# Altium PCB BEE_BOARD_PANNEL.PcbDoc
Units mm, origin at the board's own origin, x right, y up, seen from the top; angles counter-clockwise.
Board outline 177.8 x 172.72 mm, 8 copper layers (Top, GND1, PWR1, GND2, SIG1, GND3, SIG2, Bottom), stack 1.642 mm thick; 16 components, 55 nets, 6 pads, 0 vias.
Unrouted connection lines stored in the file: 24.
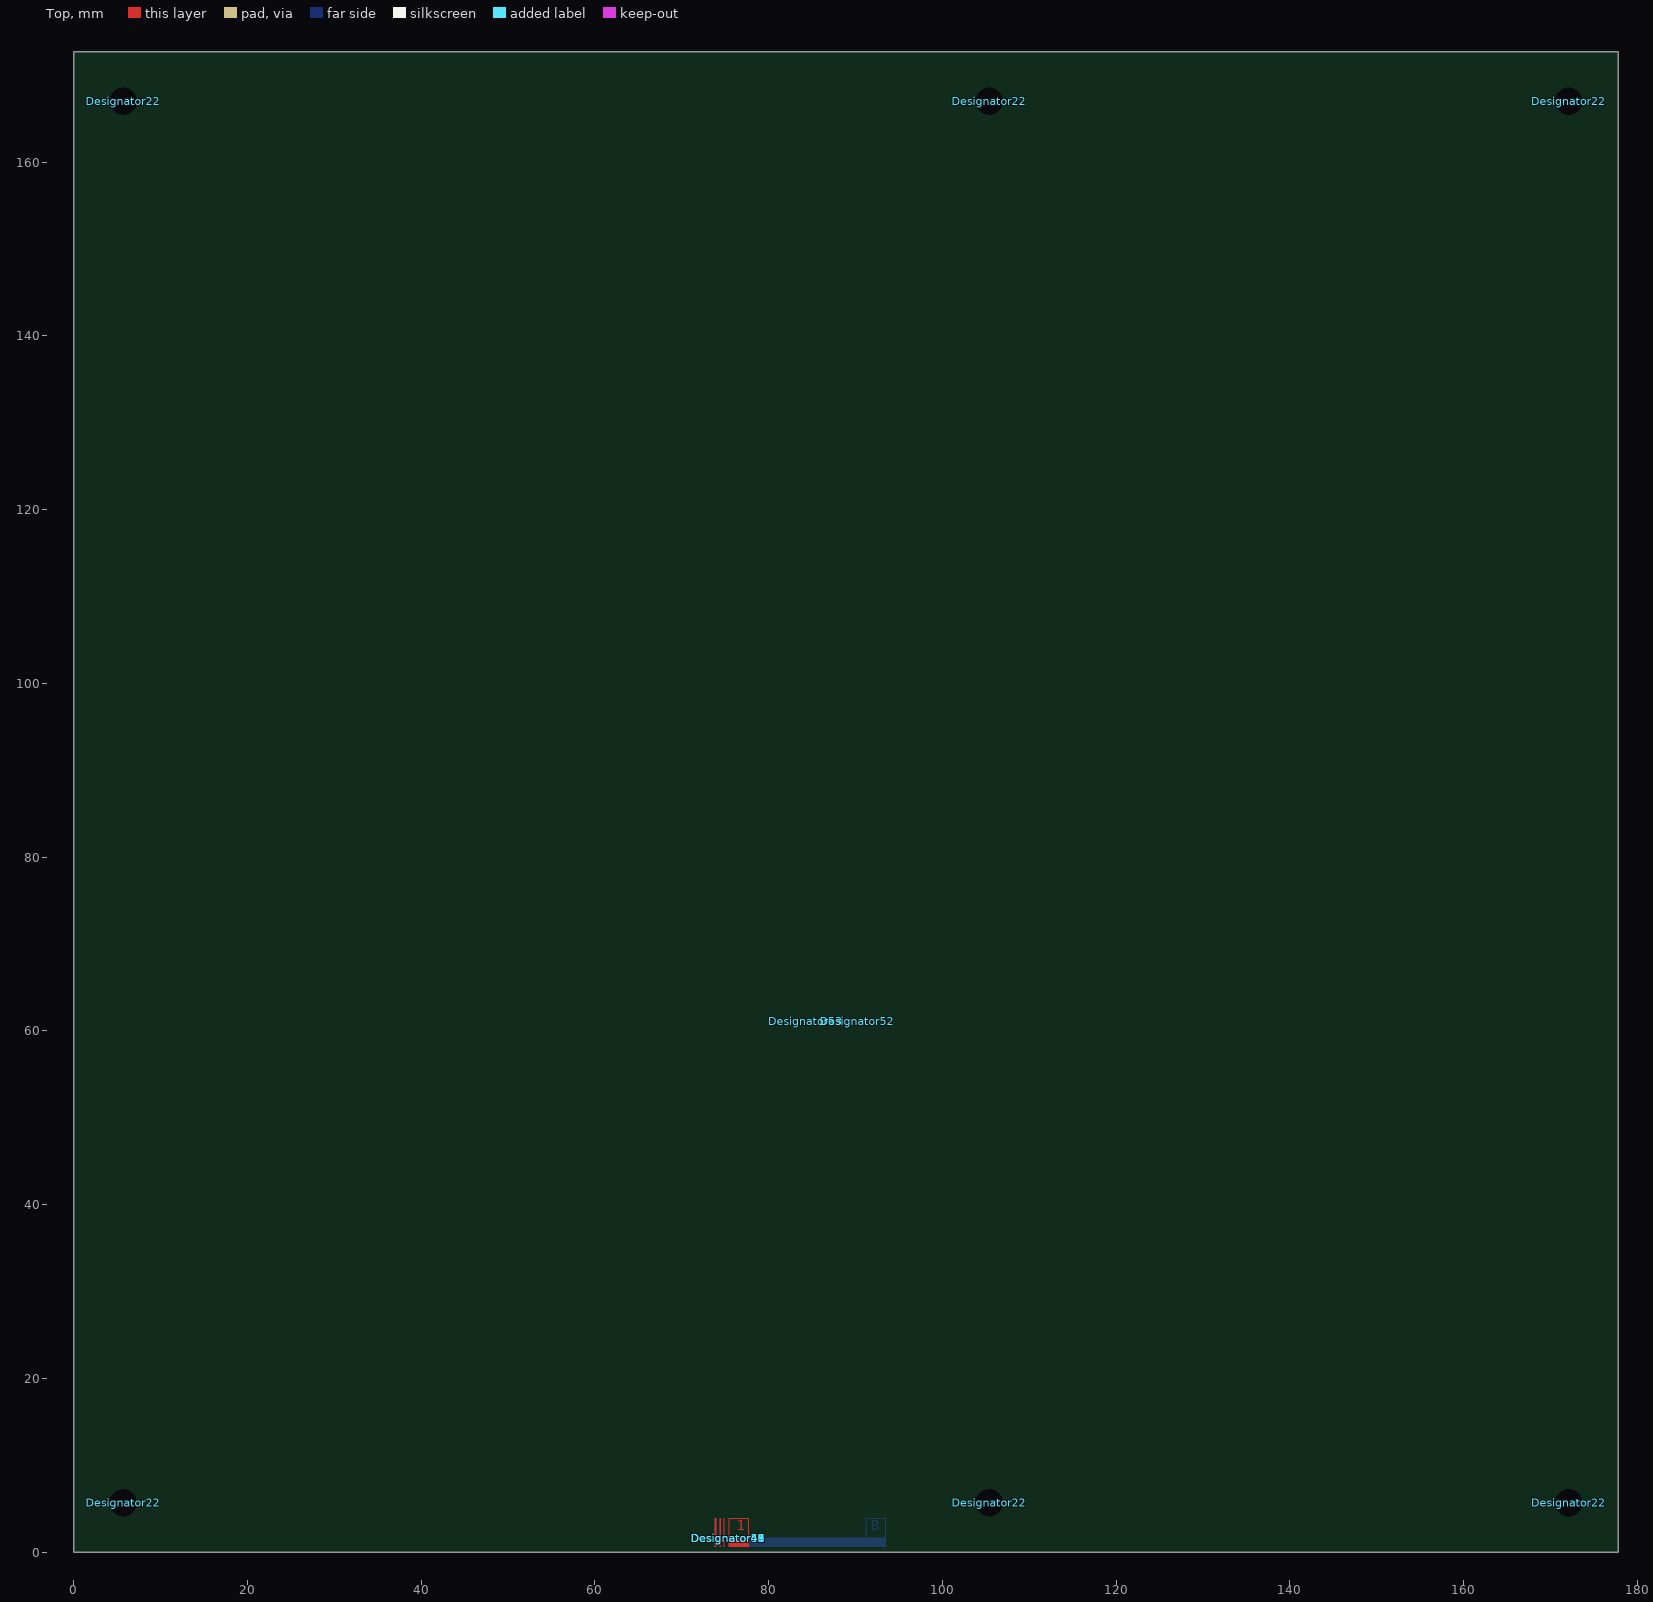
[diagram p0: Top view]
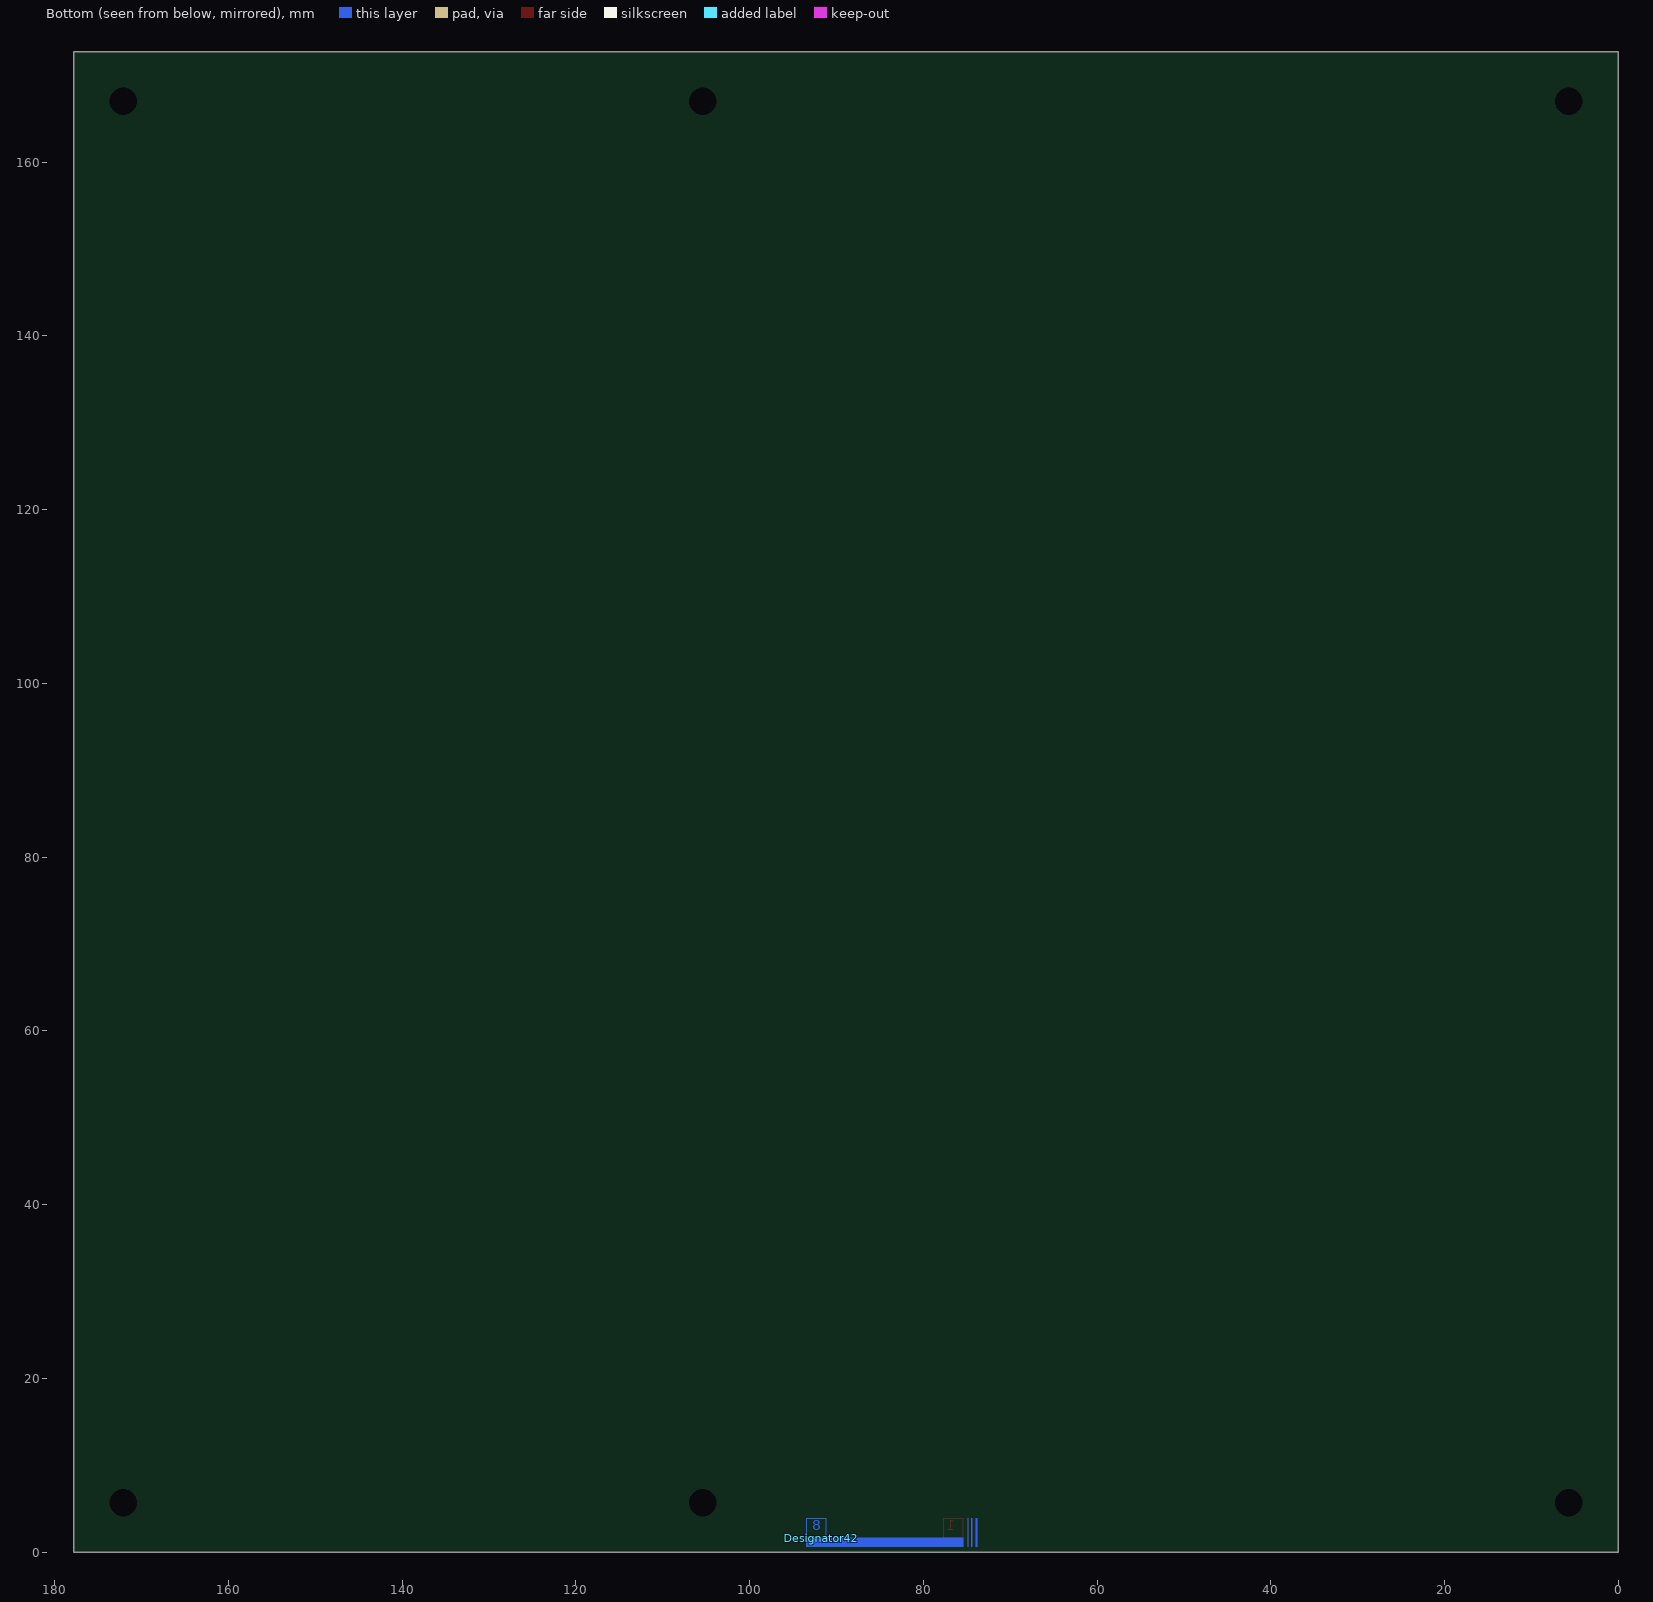
[diagram p1: Bottom view, seen from below]
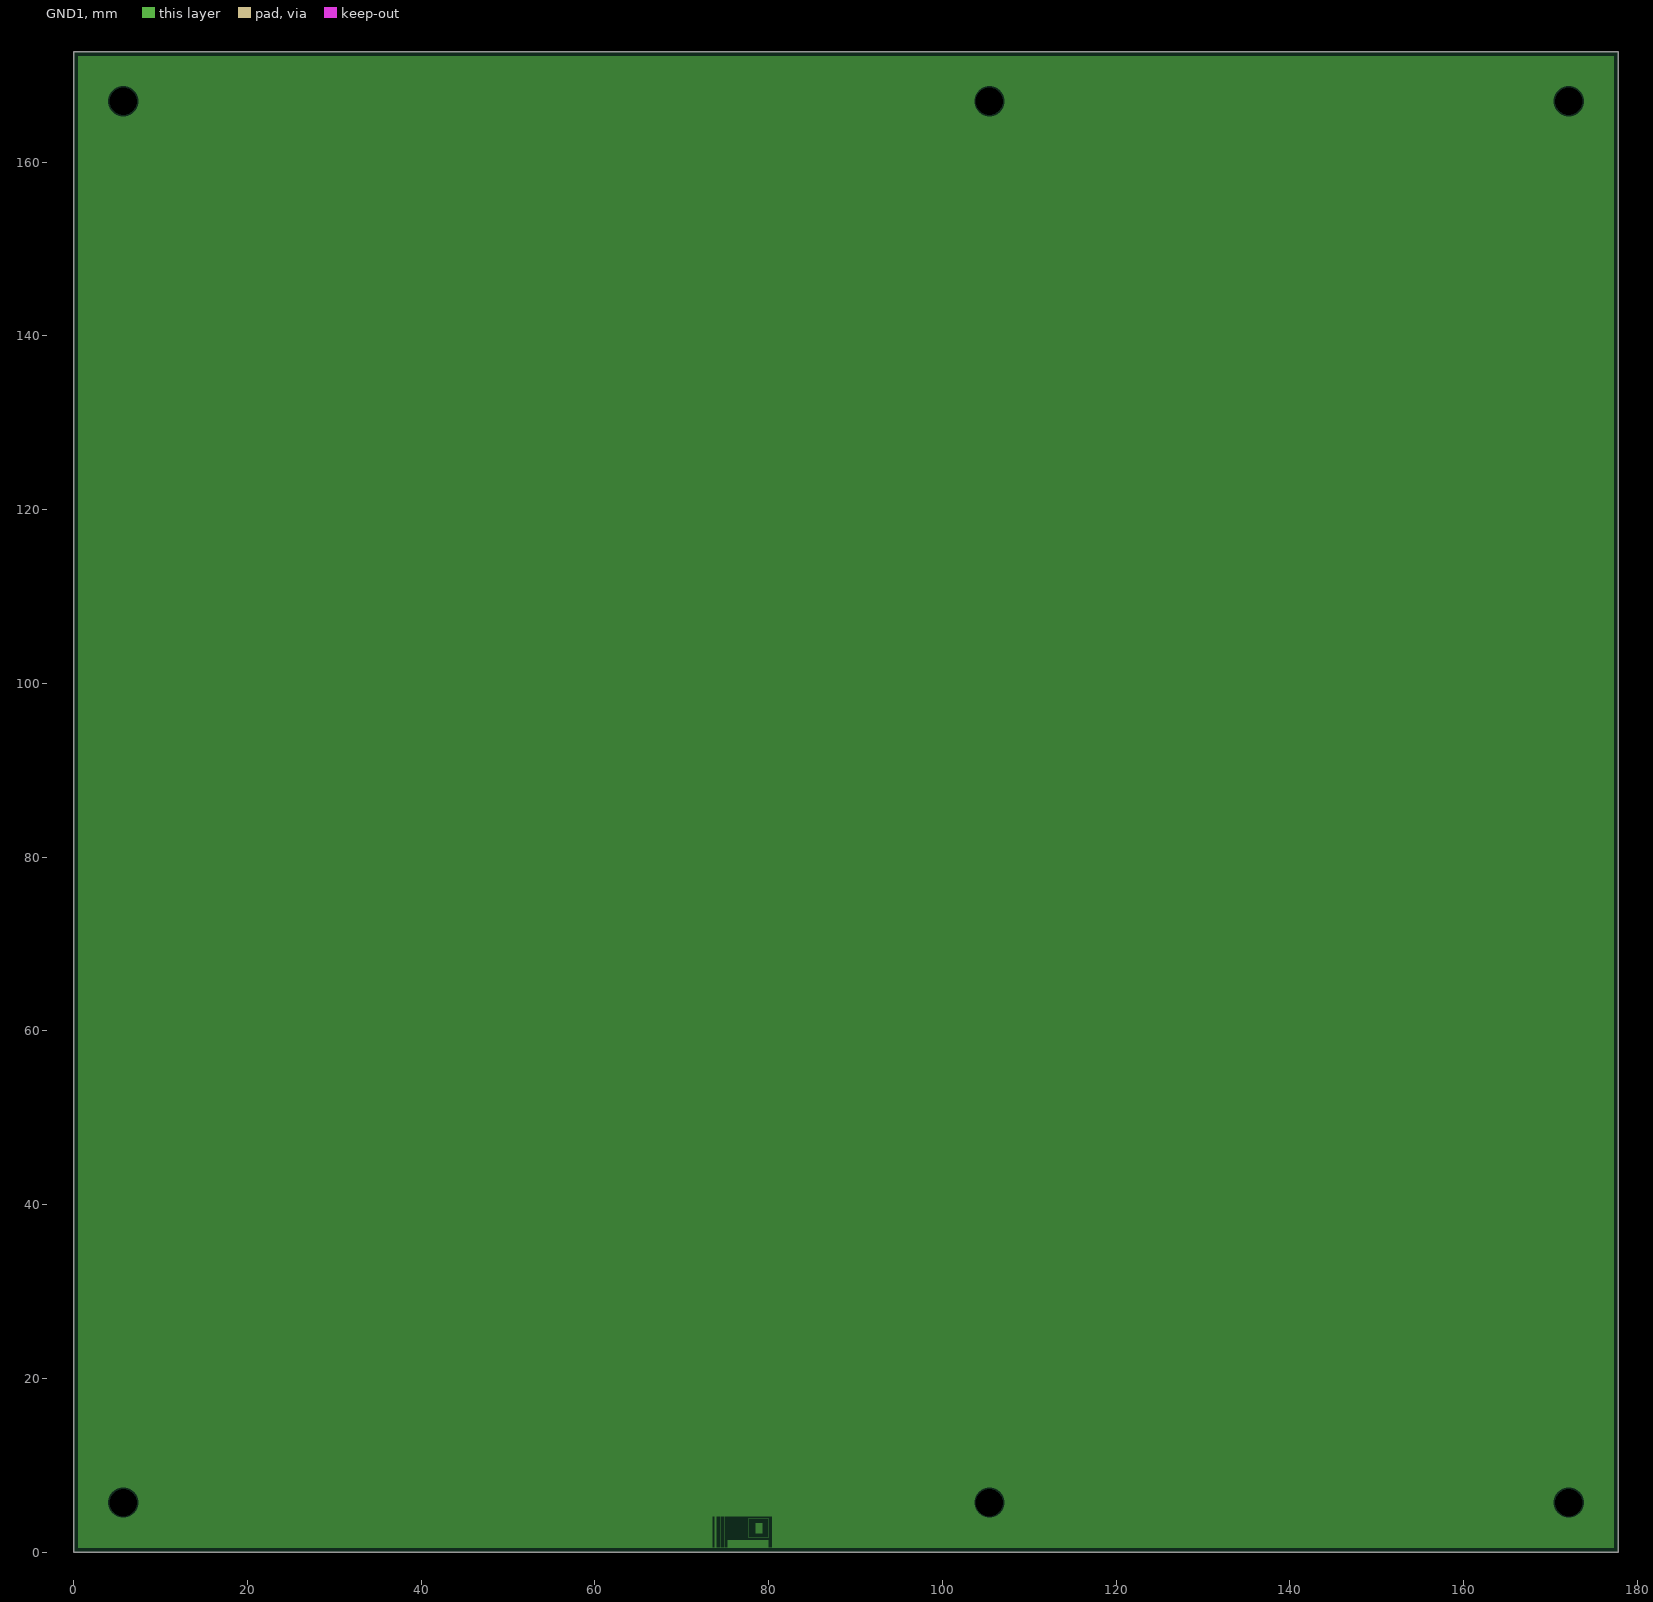
[diagram p2: GND1, clearances drawn from the general rule]
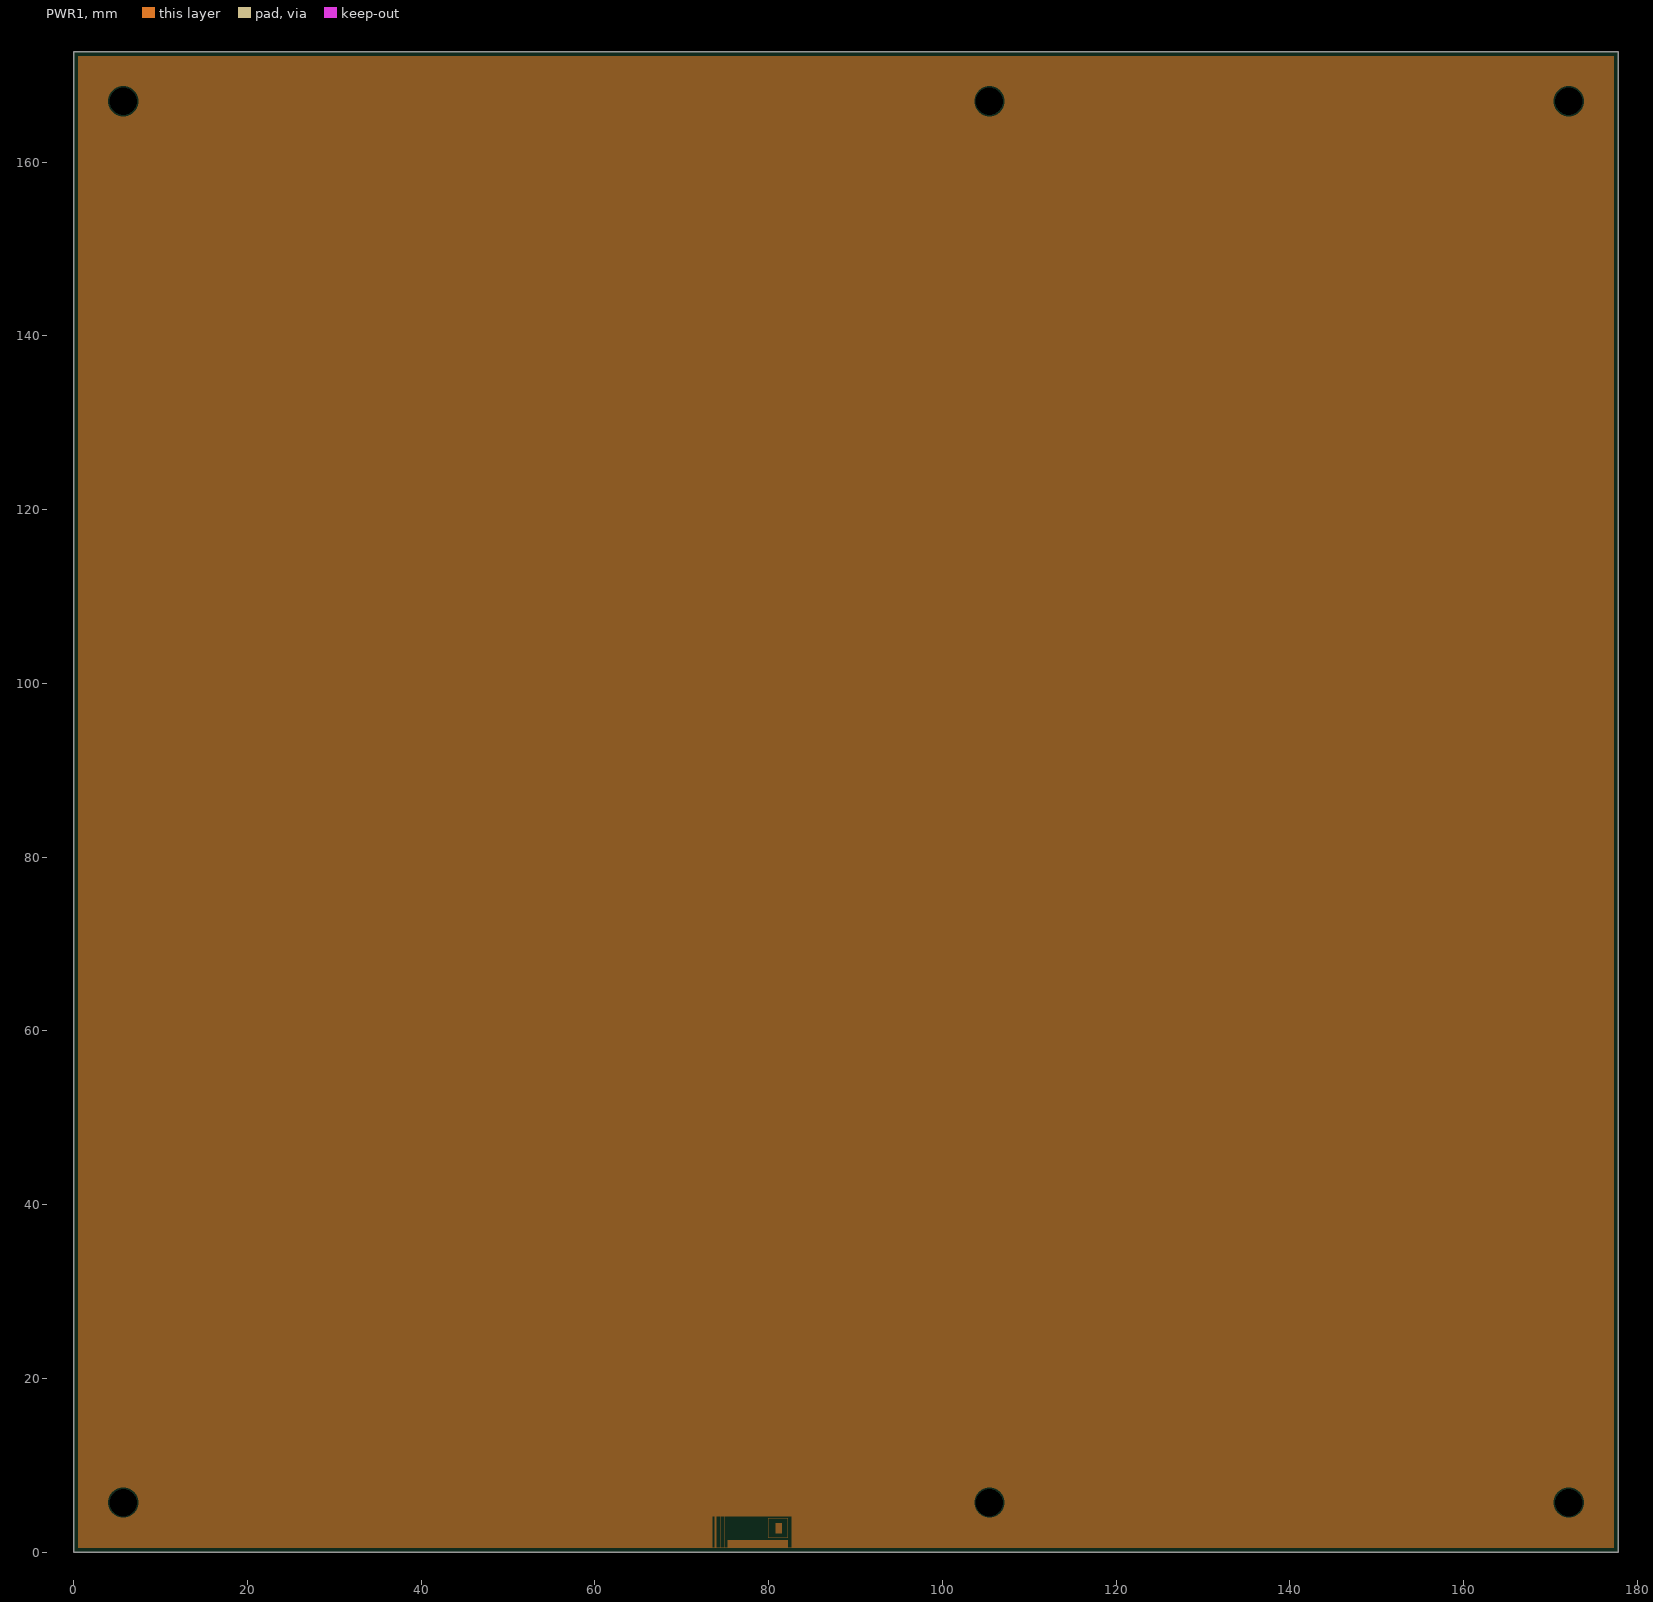
[diagram p3: PWR1, clearances drawn from the general rule]
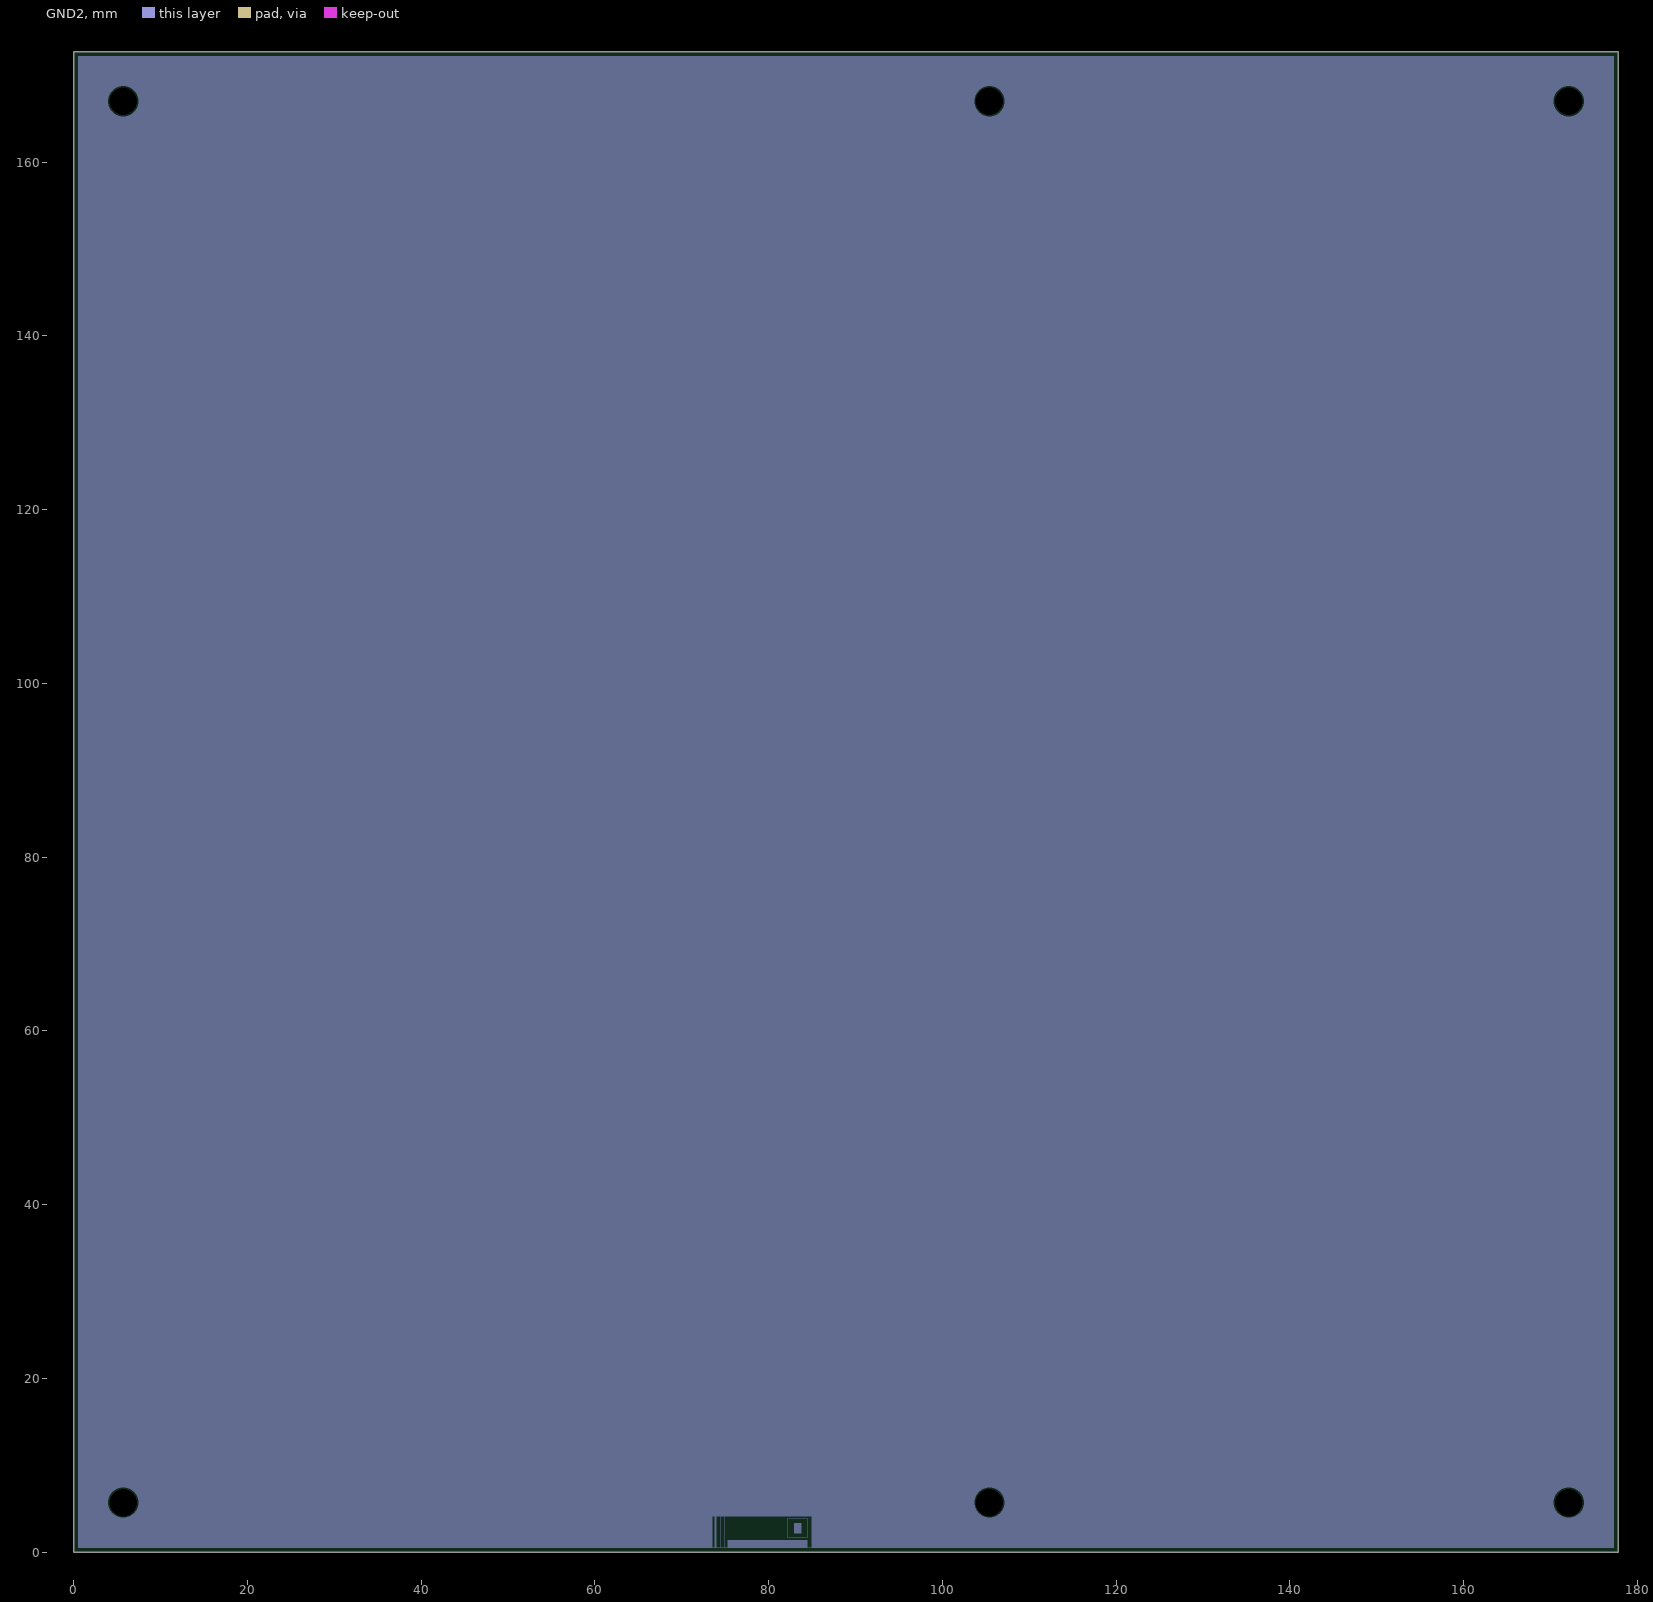
[diagram p4: GND2, clearances drawn from the general rule]
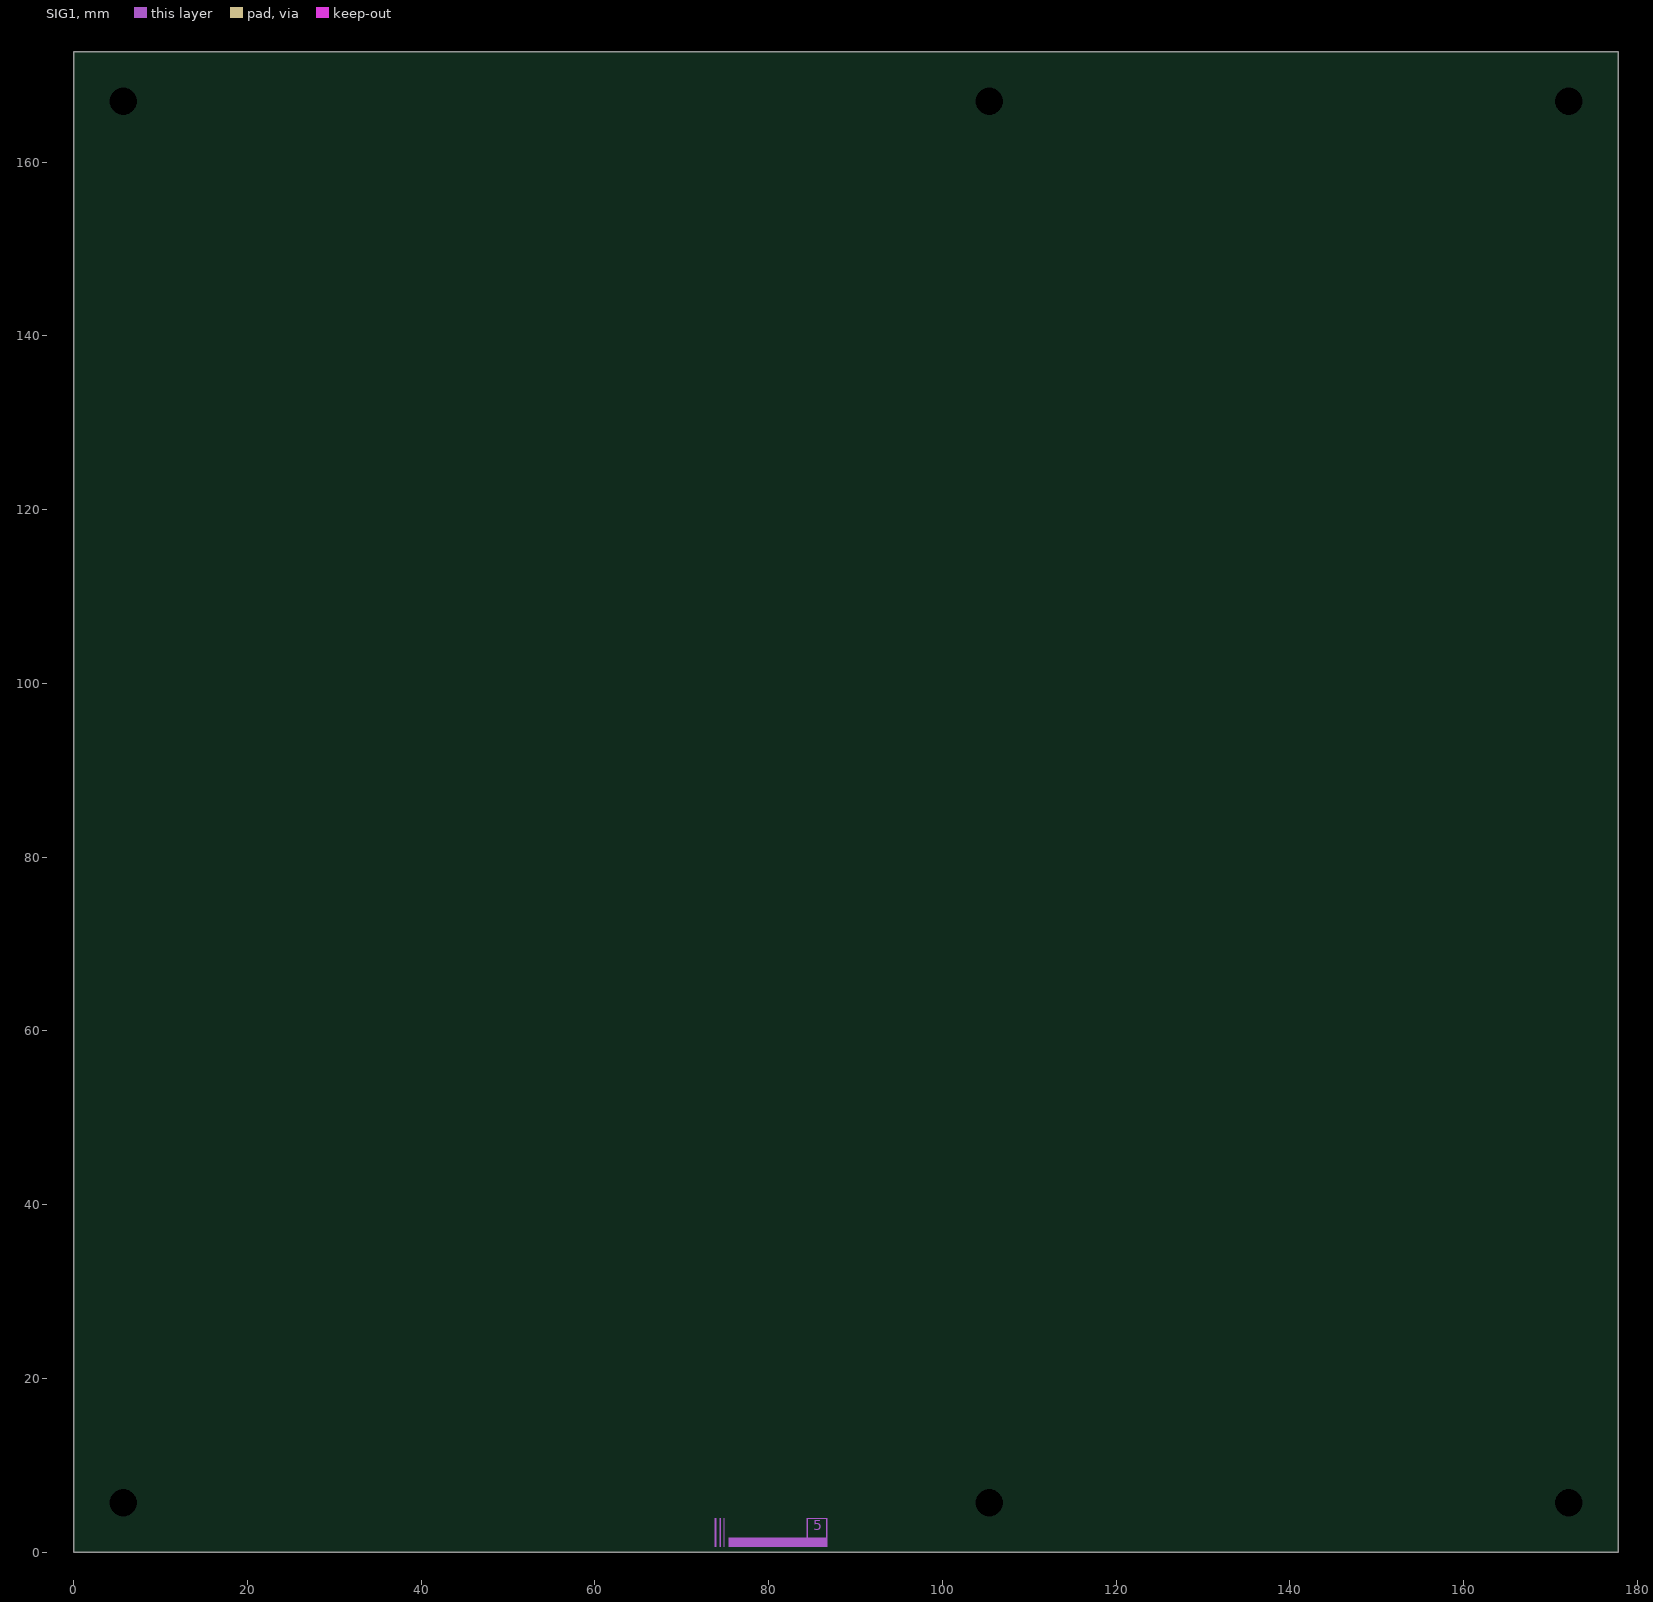
[diagram p5: SIG1]
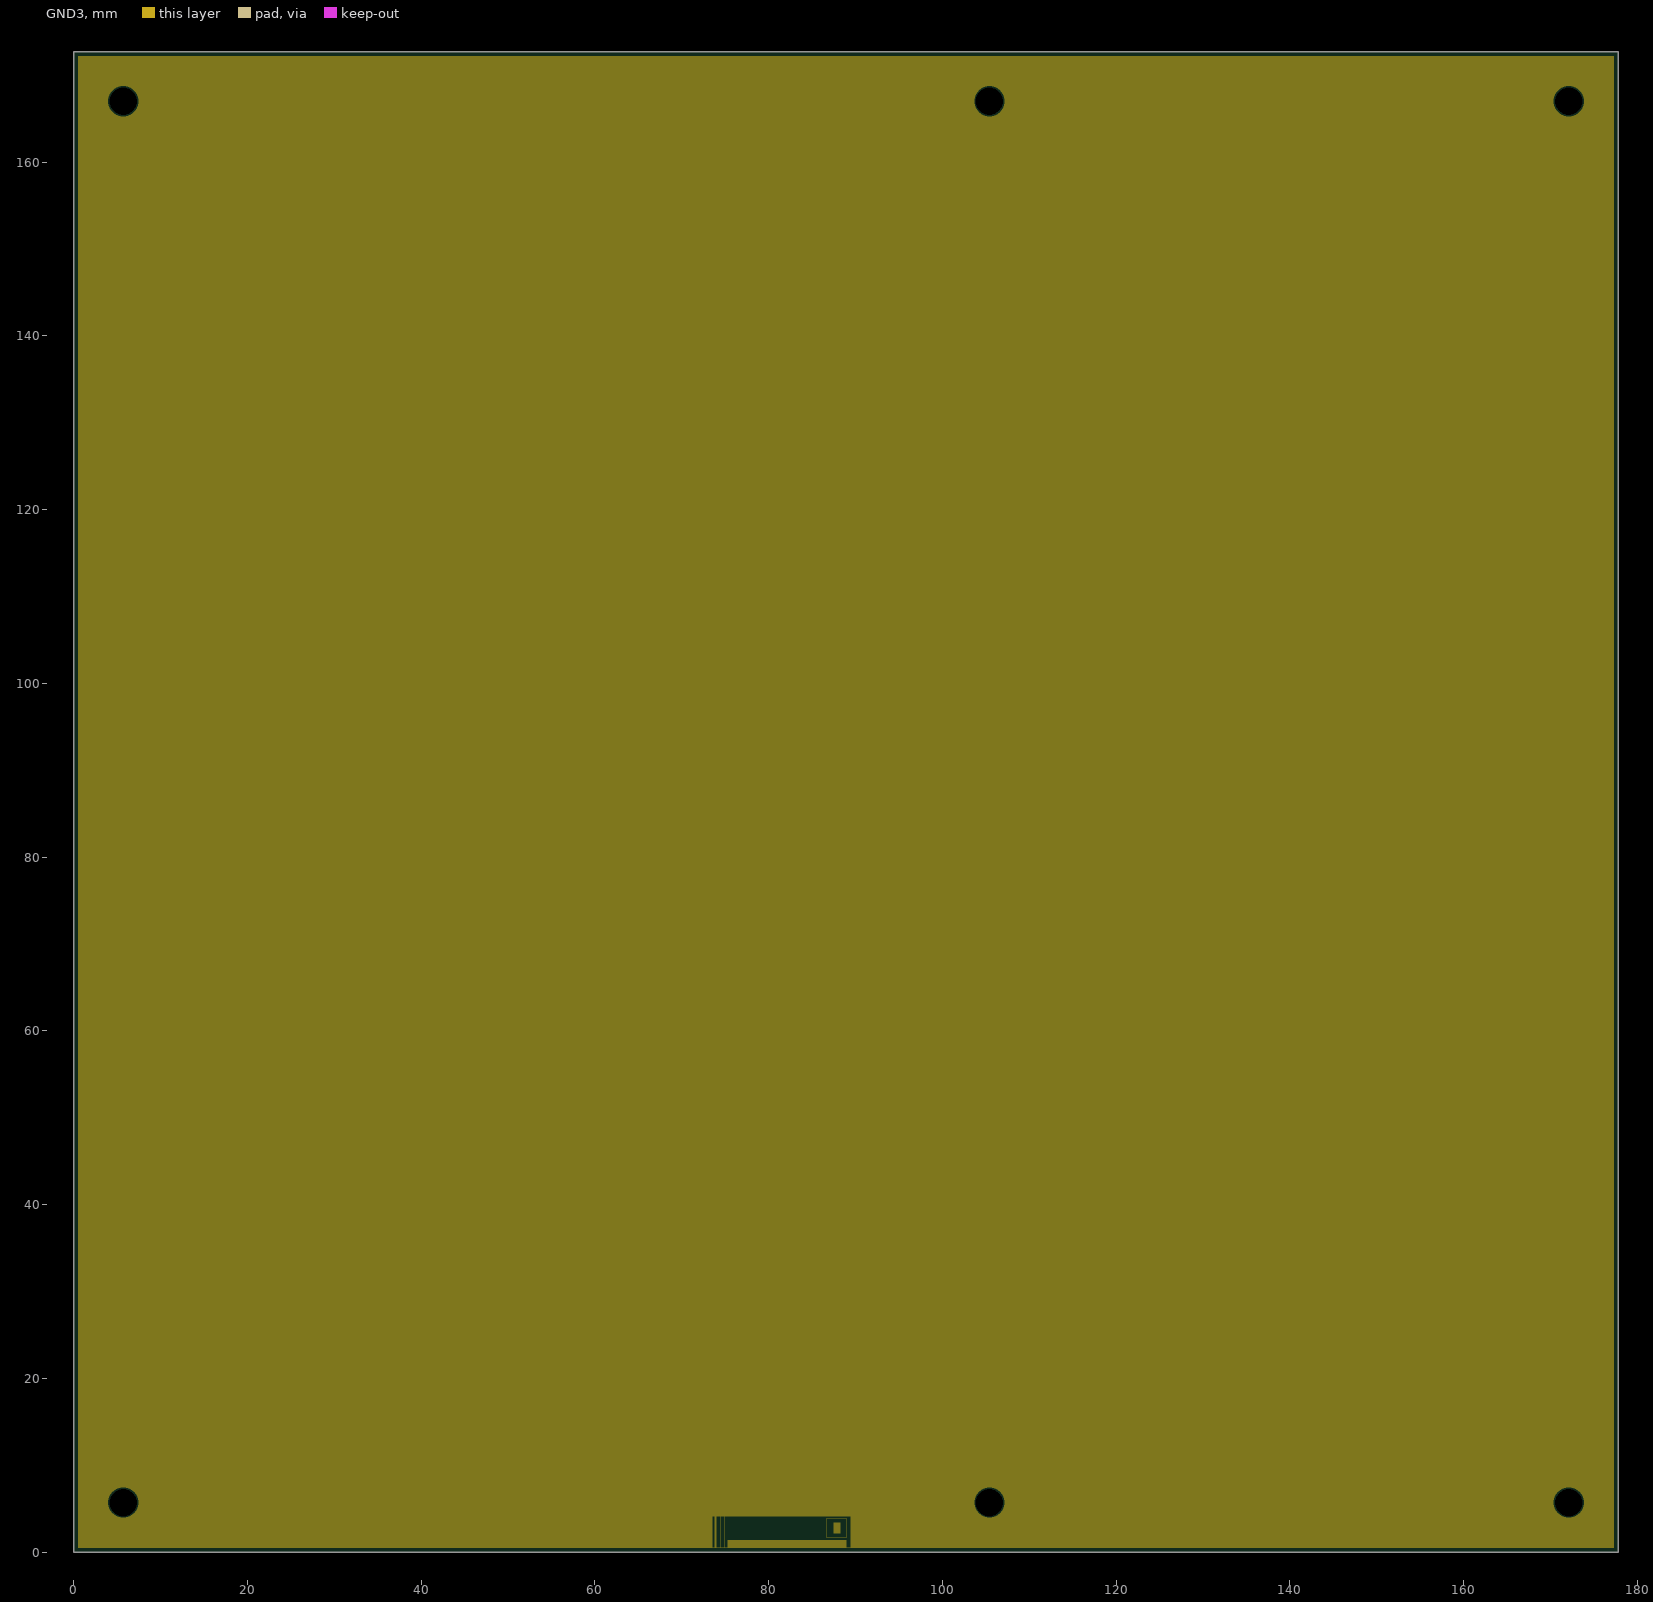
[diagram p6: GND3, clearances drawn from the general rule]
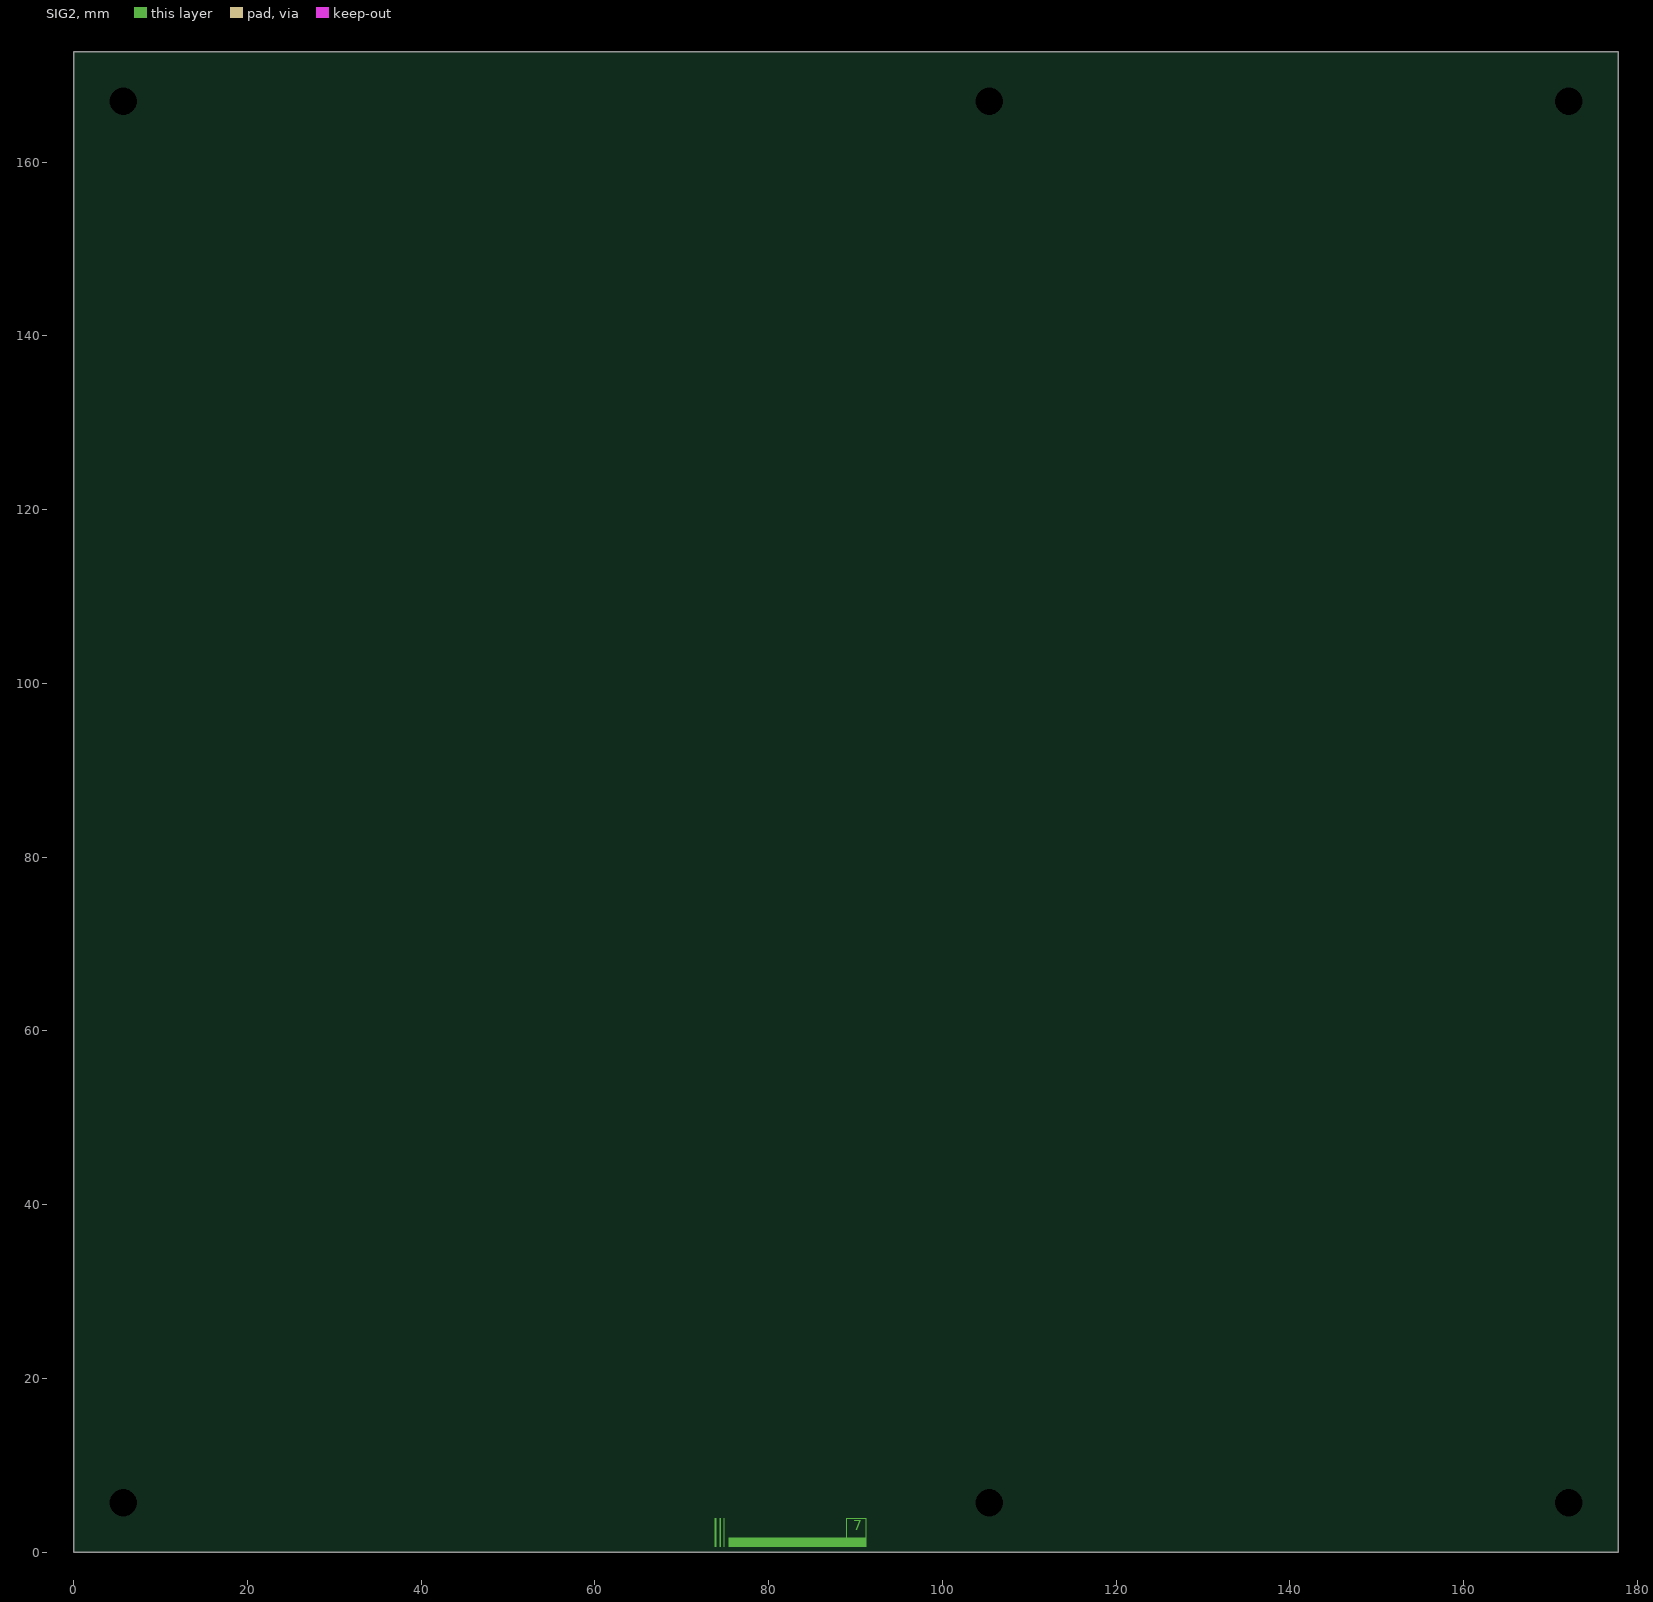
[diagram p7: SIG2]

## Layer stack, top to bottom
Top Solder: solder mask 0.0307, Dk 3.5
Top: signal copper 0.046
Dielectric 1: prepreg 0.072, Dk 4.1
GND1: plane copper 0.035, net GND
Dielectric 2: prepreg 0.262, Dk 4.1
PWR1: plane copper 0.015, net (Multiple Nets)
Dielectric 5: prepreg 0.25, Dk 4.1
GND2: plane copper 0.015, net GND
Dielectric 3: core 0.253, Dk 4.1
SIG1: signal copper 0.015
Dielectric 6: prepreg 0.25, Dk 4.1
GND3: plane copper 0.015, net GND
Dielectric 7: prepreg 0.263, Dk 4.1
SIG2: signal copper 0.035
Dielectric 4: prepreg 0.07, Dk 4.1
Bottom: signal copper 0.046
Bottom Solder: solder mask 0.0307, Solder Resist, Dk 3.5

## Board outline
0,0 177.8,0 177.8,172.72 0,172.72

## Design rules (kind name [scope] priority, off if disabled: settings)
BoardOutlineClearance BoardOutlineClearance-Silk [(OnLayer('Bottom Overlay')) OR (OnLayer('Top Overlay'))] p1: gap=0 ignorepadtopadclearanceinfootprint=FALSE
BoardOutlineClearance BoardOutlineClearance-MouseBites [InComponentClass('MouseBites')] p2: gap=0.254 ignorepadtopadclearanceinfootprint=FALSE except(0: Arc-SplitContinuation Track-SplitContinuation SMDPad-SplitContinuation THPad-OutlineEdge THPad-CavityEdge THPad-CutoutEdge THPad-SplitBarrior THPad-SplitContinuation Via-SplitContinuation Fill-SplitContinuation Poly-SplitContinuation Region-OutlineEdge Region-CavityEdge Region-CutoutEdge Region-SplitBarrior Region-SplitContinuation Text-SplitContinuation; 0.508: Arc-OutlineEdge Track-OutlineEdge SMDPad-OutlineEdge Via-OutlineEdge Fill-OutlineEdge Poly-OutlineEdge Text-OutlineEdge)
BoardOutlineClearance BoardOutlineClearance-EdgePlating [InPolygonClass('EdgePlatingPolygon')] p3: gap=0 ignorepadtopadclearanceinfootprint=FALSE
BoardOutlineClearance [All] p4: gap=0.254 ignorepadtopadclearanceinfootprint=FALSE except(0: Arc-SplitContinuation Track-SplitContinuation SMDPad-SplitContinuation THPad-SplitContinuation Via-SplitContinuation Fill-SplitContinuation Poly-SplitContinuation Region-SplitContinuation Text-SplitContinuation; 0.381: THPad-OutlineEdge; 0.508: Arc-OutlineEdge Track-OutlineEdge SMDPad-OutlineEdge Via-OutlineEdge Fill-OutlineEdge Poly-OutlineEdge Region-OutlineEdge Text-OutlineEdge)
Clearance HV-Header [(TouchesRoom('SB_HDR_HV_1') OR TouchesRoom('SB_HDR_HV_2') OR TouchesRoom('DB_HDR_HV_1') OR TouchesRoom('DB_HDR_HV_2') OR TouchesRoom('DB_HDR_HV_3') OR TouchesRoom('DB_HDR_HV_4')) AND OnTopLayer] p1: gap=0.2 ignorepadtopadclearanceinfootprint=FALSE
Clearance HV-External [InNetClass('HV') vs OnOutside] p2: gap=0.813 ignorepadtopadclearanceinfootprint=FALSE
Clearance HV-Internal [InNetClass('HV') vs OnMid] p3: gap=0.254 ignorepadtopadclearanceinfootprint=FALSE
Clearance 250V-External [InNet('-HV_MID') vs OnOutside] p4: gap=0.406 ignorepadtopadclearanceinfootprint=FALSE
Clearance 250V-Internal [InNet('-HV_MID') vs OnMid] p5: gap=0.203 ignorepadtopadclearanceinfootprint=FALSE
Clearance [All] p6: gap=0.127 ignorepadtopadclearanceinfootprint=FALSE
Clearance DiffPair [InNetClass('HighSpeedDiff')] p7: gap=0.305 ignorepadtopadclearanceinfootprint=FALSE except(0.127: Arc-Via Track-Via)
Clearance DiffPair_Same [InNetClass('HighSpeedDiff') vs InNetClass('HighSpeedDiff')] p8 off: gap=0.305 ignorepadtopadclearanceinfootprint=FALSE except(0.127: Arc-Via Track-Via)
ComponentClearance "Schematic Power Plane Clearance" [InComponent('MB1')] p1: gap=0 collisioncheckmode=3 verticalgap=0 showdistances=FALSE
ComponentClearance "Schematic Power Plane Clearance_1" [InComponent('MB2')] p2: gap=0 collisioncheckmode=3 verticalgap=0 showdistances=FALSE
ComponentClearance "Schematic Power Plane Clearance_2" [InComponent('MB3')] p3: gap=0 collisioncheckmode=3 verticalgap=0 showdistances=FALSE
ComponentClearance [All] p4: gap=0.102 collisioncheckmode=3 verticalgap=0.102 showdistances=FALSE
DiffPairsRouting [All] p1: maxlimit=0.203 minlimit=0.127 mostfreqgap=0.203 toplayer_mingap=0.203 toplayer_minwidth=0.152 toplayer_maxwidth=0.152 toplayer_prefwidth=0.152 midlayer1_maxgap=0.127 midlayer1_prefgap=0.127 midlayer1_minwidth=0.102 midlayer1_maxwidth=0.102 midlayer1_prefwidth=0.102 midlayer2_maxgap=0.127 midlayer2_prefgap=0.127 midlayer2_minwidth=0.102 midlayer2_maxwidth=0.102 midlayer2_prefwidth=0.102 bottomlayer_mingap=0.203 bottomlayer_minwidth=0.152 bottomlayer_maxwidth=0.152 bottomlayer_prefwidth=0.152 substack1={75BE2CDD-B6BC-43A9-B0B8-E5D107F690DA} toplayer_{75be2cdd-b6bc-43a9-b0b8-e5d107f690da}_mingap=0.254 toplayer_{75be2cdd-b6bc-43a9-b0b8-e5d107f690da}_maxgap=0.254 toplayer_{75be2cdd-b6bc-43a9-b0b8-e5d107f690da}_prefgap=0.254 toplayer_{75be2cdd-b6bc-43a9-b0b8-e5d107f690da}_minwidth=0.381 toplayer_{75be2cdd-b6bc-43a9-b0b8-e5d107f690da}_maxwidth=0.381 toplayer_{75be2cdd-b6bc-43a9-b0b8-e5d107f690da}_prefwidth=0.381 midlayer1_{75be2cdd-b6bc-43a9-b0b8-e5d107f690da}_mingap=0.254 midlayer1_{75be2cdd-b6bc-43a9-b0b8-e5d107f690da}_maxgap=0.254 midlayer1_{75be2cdd-b6bc-43a9-b0b8-e5d107f690da}_prefgap=0.254 midlayer1_{75be2cdd-b6bc-43a9-b0b8-e5d107f690da}_minwidth=0.381 midlayer1_{75be2cdd-b6bc-43a9-b0b8-e5d107f690da}_maxwidth=0.381 midlayer1_{75be2cdd-b6bc-43a9-b0b8-e5d107f690da}_prefwidth=0.381 midlayer2_{75be2cdd-b6bc-43a9-b0b8-e5d107f690da}_mingap=0.254 midlayer2_{75be2cdd-b6bc-43a9-b0b8-e5d107f690da}_maxgap=0.254 midlayer2_{75be2cdd-b6bc-43a9-b0b8-e5d107f690da}_prefgap=0.254 midlayer2_{75be2cdd-b6bc-43a9-b0b8-e5d107f690da}_minwidth=0.381 midlayer2_{75be2cdd-b6bc-43a9-b0b8-e5d107f690da}_maxwidth=0.381 midlayer2_{75be2cdd-b6bc-43a9-b0b8-e5d107f690da}_prefwidth=0.381 bottomlayer_{75be2cdd-b6bc-43a9-b0b8-e5d107f690da}_mingap=0.254 bottomlayer_{75be2cdd-b6bc-43a9-b0b8-e5d107f690da}_maxgap=0.254 bottomlayer_{75be2cdd-b6bc-43a9-b0b8-e5d107f690da}_prefgap=0.254 bottomlayer_{75be2cdd-b6bc-43a9-b0b8-e5d107f690da}_minwidth=0.381 bottomlayer_{75be2cdd-b6bc-43a9-b0b8-e5d107f690da}_maxwidth=0.381 bottomlayer_{75be2cdd-b6bc-43a9-b0b8-e5d107f690da}_prefwidth=0.381 substack2={262D281F-C28D-4C33-AC31-2A03EAF8B961} toplayer_{262d281f-c28d-4c33-ac31-2a03eaf8b961}_mingap=0.254 toplayer_{262d281f-c28d-4c33-ac31-2a03eaf8b961}_maxgap=0.254 toplayer_{262d281f-c28d-4c33-ac31-2a03eaf8b961}_prefgap=0.254 toplayer_{262d281f-c28d-4c33-ac31-2a03eaf8b961}_minwidth=0.381 toplayer_{262d281f-c28d-4c33-ac31-2a03eaf8b961}_maxwidth=0.381 toplayer_{262d281f-c28d-4c33-ac31-2a03eaf8b961}_prefwidth=0.381 midlayer1_{262d281f-c28d-4c33-ac31-2a03eaf8b961}_mingap=0.254 midlayer1_{262d281f-c28d-4c33-ac31-2a03eaf8b961}_maxgap=0.254 midlayer1_{262d281f-c28d-4c33-ac31-2a03eaf8b961}_prefgap=0.254 midlayer1_{262d281f-c28d-4c33-ac31-2a03eaf8b961}_minwidth=0.381 midlayer1_{262d281f-c28d-4c33-ac31-2a03eaf8b961}_maxwidth=0.381 midlayer1_{262d281f-c28d-4c33-ac31-2a03eaf8b961}_prefwidth=0.381 midlayer2_{262d281f-c28d-4c33-ac31-2a03eaf8b961}_mingap=0.254 midlayer2_{262d281f-c28d-4c33-ac31-2a03eaf8b961}_maxgap=0.254 midlayer2_{262d281f-c28d-4c33-ac31-2a03eaf8b961}_prefgap=0.254 midlayer2_{262d281f-c28d-4c33-ac31-2a03eaf8b961}_minwidth=0.381 midlayer2_{262d281f-c28d-4c33-ac31-2a03eaf8b961}_maxwidth=0.381 midlayer2_{262d281f-c28d-4c33-ac31-2a03eaf8b961}_prefwidth=0.381 bottomlayer_{262d281f-c28d-4c33-ac31-2a03eaf8b961}_mingap=0.254 bottomlayer_{262d281f-c28d-4c33-ac31-2a03eaf8b961}_maxgap=0.254 bottomlayer_{262d281f-c28d-4c33-ac31-2a03eaf8b961}_prefgap=0.254 bottomlayer_{262d281f-c28d-4c33-ac31-2a03eaf8b961}_minwidth=0.381 bottomlayer_{262d281f-c28d-4c33-ac31-2a03eaf8b961}_maxwidth=0.381 bottomlayer_{262d281f-c28d-4c33-ac31-2a03eaf8b961}_prefwidth=0.381 maxuncoupledlength=12.7
HoleSize [All] p1: absolutevalues=TRUE maxlimit=25.4 minlimit=0.102 maxpercent=80.000 minpercent=20.000
HoleToHoleClearance [All] p1: gap=0.127 allowstackedmicrovias=TRUE
MatchedLengths DiffMatching_WithinPair [InDifferentialPairClass('All Differential Pairs')] p1: tolerance=0.025 checknetsindiffpair=TRUE checkdiffpairvsdiffpair=FALSE checkxsignals=FALSE checkothers=FALSE
MatchedLengths DiffMatching [InDifferentialPairClass('All Differential Pairs')] p2: tolerance=0.025 checknetsindiffpair=FALSE checkdiffpairvsdiffpair=TRUE checkxsignals=TRUE checkothers=TRUE
MinimumSolderMaskSliver [All] p1: minsoldermaskwidth=0.099
PlaneClearance [All] p1: clearance=0.152
PlaneConnect [All] p1: pad.planeconnectstyle=Relief pad.reliefexpansion=0.508 pad.reliefentries=4 pad.reliefconductorwidth=0.254 pad.reliefairgap=0.254 via.planeconnectstyle=Direct via.reliefexpansion=0.508 via.reliefentries=4 via.reliefconductorwidth=0.254 via.reliefairgap=0.254
PolygonConnect [All] p1: thpad.connectstyle=Relief thpad.reliefconductorwidth=0.254 thpad.reliefentries=4 thpad.polygonreliefangle="90 Angle" thpad.airgapwidth=0.254 smdpad.connectstyle=Direct smdpad.reliefconductorwidth=0.254 smdpad.reliefentries=4 smdpad.polygonreliefangle="90 Angle" smdpad.airgapwidth=0.254 via.connectstyle=Direct via.reliefconductorwidth=0.254 via.reliefentries=4 via.polygonreliefangle="90 Angle" via.airgapwidth=0.254
RoutingVias [All] p1: holewidth=0.254 width=0.457 viastyle="Through Hole" minholewidth=0.254 minwidth=0.457 maxholewidth=0.254 maxwidth=0.762
SilkToSilkClearance [All] p1: silktosilkclearance=0.025
SilkToSolderMaskClearance [IsPad] p1: minsilkscreentomaskgap=0.034 clearancetoexposedcopper=FALSE
SolderMaskExpansion [All] p1: expansion=0.051
Width [All] p1: maxlimit=25.4 minlimit=0.102 preferedwidth=0.152
21 further rules are at their usual default settings.

## Classes and differential pairs
net class HighSpeedDiff: M1_CLK_N M1_CLK_P M1_CMD_IN_N M1_CMD_IN_P M1_CMD_OUT_N M1_CMD_OUT_P M1_HSL_N M1_HSL_P M1_SYNC_N M1_SYNC_P M2_CLK_N M2_CLK_P M2_CMD_IN_N M2_CMD_IN_P M2_CMD_OUT_N M2_CMD_OUT_P M2_HSL_N M2_HSL_P M2_SYNC_N M2_SYNC_P
net class HV: -HV M1_SOURCE_-HV_A M1_SOURCE_-HV_B M2_SOURCE_-HV_A M2_SOURCE_-HV_B
differential pair M2_SYNC: +M2_SYNC_P -M2_SYNC_N
differential pair M2_HSL: +M2_HSL_P -M2_HSL_N
differential pair M2_CMD_OUT: +M2_CMD_OUT_P -M2_CMD_OUT_N
differential pair M2_CMD_IN: +M2_CMD_IN_P -M2_CMD_IN_N
differential pair M2_CLK: +M2_CLK_P -M2_CLK_N
differential pair M1_SYNC: +M1_SYNC_P -M1_SYNC_N
differential pair M1_HSL: +M1_HSL_P -M1_HSL_N
differential pair M1_CMD_OUT: +M1_CMD_OUT_P -M1_CMD_OUT_N
differential pair M1_CMD_IN: +M1_CMD_IN_P -M1_CMD_IN_N
differential pair M1_CLK: +M1_CLK_P -M1_CLK_N

## Components (designator, comment, footprint, x,y, rotation, side; value= is the part's Value field where it differs from the comment)
Designator22 "Comment" MTH_125MIL_NON-PLATED 172.085,5.715 r0 top
Designator22 "Comment" MTH_125MIL_NON-PLATED 105.41,5.715 r0 top
Designator22 "Comment" MTH_125MIL_NON-PLATED 5.715,5.715 r0 top
Designator22 "Comment" MTH_125MIL_NON-PLATED 105.41,167.005 r0 top
Designator22 "Comment" MTH_125MIL_NON-PLATED 172.085,167.005 r0 top
Designator22 "Comment" MTH_125MIL_NON-PLATED 5.715,167.005 r0 top
Designator41 "Comment" LYR-MARKER-SIGNAL-1 75.373,1.592 r0 top
Designator42 "Comment" LYR-MARKER-SIGNAL-8 91.723,1.592 r180 bottom
Designator45 "Comment" LYR-MARKER-PLANE-2 75.373,1.592 r0 top
Designator46 "Comment" LYR-MARKER-PLANE-3 75.373,1.592 r0 top
Designator47 "Comment" LYR-MARKER-PLANE-4 75.373,1.592 r0 top
Designator48 "Comment" LYR-MARKER-SIGNAL-5 75.373,1.592 r0 top
Designator49 "Comment" LYR-MARKER-PLANE-6 75.373,1.592 r0 top
Designator51 "Comment" LYR-MARKER-SIGNAL-7 75.373,1.592 r0 top
Designator52 "Comment" STN_STENCIL_TOP_ZELFLEXQR-406x508 90.214,61.108 r0 top locked
Designator53 "Comment" STN_STENCIL_BOT_ZELFLEXQR-406x508 84.239,61.108 r0 top locked

## Footprints (in the part's own frame and the unit in brackets; to place one, negate y for a bottom-side part, rotate by r counter-clockwise, add the part's x,y. Pads: shape width x height; smd on the part's side, far side on the other; paste and mask are expansions set on the pad)
LYR-MARKER-PLANE-2 [mm]
  GND1 region: 4.75,-0.125 4.75,0 2.125,0 2.125,-0.125
  GND1 region: 2.125,-0.125 2.25,-0.125 2.25,2.5 2.125,2.5
  GND1 region: 2.375,0.552 2.375,0.125 4.5,0.125 4.5,0.552
  GND1 region: 4.5,1.83 4.5,2.25 2.375,2.25 2.375,1.83
  GND1 region: 2.375,0.125 3.103,0.125 3.103,2.25 2.375,2.25
  GND1 region: 4.75,2.375 4.75,2.5 2.125,2.5 2.125,2.375
  GND1 region: 4.625,-1 5,-1 5,2.5 4.625,2.5
  GND1 region: -0.125,-0.125 2.25,-0.125 2.25,2.5 -0.125,2.5
  GND1 region: -0.449,-1 -0.125,-1 -0.125,2.5 -0.449,2.5
  GND1 region: -0.874,-1 -0.551,-1 -0.551,2.5 -0.874,2.5
  GND1 region: -1.373,-1 -1.026,-1 -1.026,2.5 -1.373,2.5
  GND1 region: -1.8,-1 -1.627,-1 -1.627,2.5 -1.8,2.5
  GND1 region: 4.5,2.25 3.923,2.25 3.923,0.125 4.5,0.125
LYR-MARKER-PLANE-3 [mm]
  PWR1 region: -0.449,-1 -0.125,-1 -0.125,2.5 -0.449,2.5
  PWR1 region: -0.874,-1 -0.551,-1 -0.551,2.5 -0.874,2.5
  PWR1 region: -1.373,-1 -1.026,-1 -1.026,2.5 -1.373,2.5
  PWR1 region: -1.8,-1 -1.627,-1 -1.627,2.5 -1.8,2.5
  PWR1 region: -0.125,-0.125 4.399,-0.125 4.399,2.5 -0.125,2.5
  PWR1 region: 7,-0.125 7,0 4.375,0 4.375,-0.125
  PWR1 region: 4.625,0.552 4.625,0.125 6.75,0.125 6.75,0.552
  PWR1 region: 6.75,2.25 6.189,2.25 6.189,0.125 6.75,0.125
  PWR1 region: 6.75,1.83 6.75,2.25 4.625,2.25 4.625,1.83
  PWR1 region: 4.625,0.125 5.356,0.125 5.356,2.25 4.625,2.25
  PWR1 region: 7,2.375 7,2.5 4.375,2.5 4.375,2.375
  PWR1 region: 2.125,-0.125 2.25,-0.125 2.25,2.5 2.125,2.5
  PWR1 region: 4.375,-0.125 4.5,-0.125 4.5,2.5 4.375,2.5
  PWR1 region: 6.875,-1 7.25,-1 7.25,2.5 6.875,2.5
LYR-MARKER-PLANE-4 [mm]
  GND2 region: -0.449,-1 -0.125,-1 -0.125,2.5 -0.449,2.5
  GND2 region: -0.874,-1 -0.551,-1 -0.551,2.5 -0.874,2.5
  GND2 region: -1.373,-1 -1.026,-1 -1.026,2.5 -1.373,2.5
  GND2 region: -1.8,-1 -1.627,-1 -1.627,2.5 -1.8,2.5
  GND2 region: 9.25,2.375 9.25,2.5 6.625,2.5 6.625,2.375
  GND2 region: 9,1.83 9,2.25 6.875,2.25 6.875,1.83
  GND2 region: 6.875,0.562 6.875,0.125 9,0.125 9,0.562
  GND2 region: 9.25,-0.125 9.25,0 6.625,0 6.625,-0.125
  GND2 region: -0.125,-0.125 6.636,-0.125 6.636,2.5 -0.125,2.5
  GND2 region: 6.625,-0.125 6.75,-0.125 6.75,2.5 6.625,2.5
  GND2 region: 9.125,-1 9.5,-1 9.5,2.5 9.125,2.5
  GND2 region: 6.875,0.125 7.535,0.125 7.535,2.25 6.875,2.25
  GND2 region: 9,2.25 8.413,2.25 8.413,0.125 9,0.125
LYR-MARKER-PLANE-6 [mm]
  GND3 region: -0.449,-1 -0.125,-1 -0.125,2.5 -0.449,2.5
  GND3 region: -0.874,-1 -0.551,-1 -0.551,2.5 -0.874,2.5
  GND3 region: -1.373,-1 -1.026,-1 -1.026,2.5 -1.373,2.5
  GND3 region: -1.8,-1 -1.627,-1 -1.627,2.5 -1.8,2.5
  GND3 region: 13.75,-0.125 13.75,0 11.125,0 11.125,-0.125
  GND3 region: 11.375,0.552 11.375,0.125 13.5,0.125 13.5,0.552
  GND3 region: 13.5,1.848 13.5,2.25 11.375,2.25 11.375,1.848
  GND3 region: 11.375,0.125 12.068,0.125 12.068,2.25 11.375,2.25
  GND3 region: 13.75,2.375 13.75,2.5 11.125,2.5 11.125,2.375
  GND3 region: -0.125,-0.125 11.142,-0.125 11.142,2.5 -0.125,2.5
  GND3 region: 11.125,-0.125 11.25,-0.125 11.25,2.5 11.125,2.5
  GND3 region: 13.625,-1 14,-1 14,2.5 13.625,2.5
  GND3 region: 13.5,2.25 12.907,2.25 12.907,0.125 13.5,0.125
LYR-MARKER-SIGNAL-1 [mm]
  Top region: 2.25,0 2.375,0 2.375,2.375 2.25,2.375
  Top region: 0,0.125 0,-1 2.375,-1 2.375,0.125
  Top region: 2.375,2.375 2.25,2.375 2.25,0 2.375,0
  Top region: 2.375,2.25 2.375,2.375 0,2.375 0,2.25
  Top region: 0,0 0.125,0 0.125,2.375 0,2.375
  Top region: -1.627,-1 -1.373,-1 -1.373,2.375 -1.627,2.375
  Top region: -1.026,-1 -0.874,-1 -0.874,2.375 -1.026,2.375
  Top region: -0.551,-1 -0.449,-1 -0.449,2.375 -0.551,2.375
  Top pour cut-out: -1.9,2.5 -1.9,-1 2.5,-1 2.5,2.5
LYR-MARKER-SIGNAL-5 [mm]
  SIG1 region: -1.627,-1 -1.373,-1 -1.373,2.375 -1.627,2.375
  SIG1 region: -1.026,-1 -0.874,-1 -0.874,2.375 -1.026,2.375
  SIG1 region: -0.551,-1 -0.449,-1 -0.449,2.375 -0.551,2.375
  SIG1 region: 11.25,0 11.375,0 11.375,2.375 11.25,2.375
  SIG1 region: 11.375,2.25 11.375,2.375 9,2.375 9,2.25
  SIG1 region: 11.375,2.375 11.25,2.375 11.25,0 11.375,0
  SIG1 region: 0,0.125 0,-1 11.375,-1 11.375,0.125
  SIG1 region: 9.125,2.375 9,2.375 9,0 9.125,0
  SIG1 pour cut-out: -1.8,2.5 -1.8,-1 11.5,-1 11.5,2.5
LYR-MARKER-SIGNAL-7 [mm]
  SIG2 region: -1.627,-1 -1.373,-1 -1.373,2.375 -1.627,2.375
  SIG2 region: -1.026,-1 -0.874,-1 -0.874,2.375 -1.026,2.375
  SIG2 region: -0.551,-1 -0.449,-1 -0.449,2.375 -0.551,2.375
  SIG2 region: 13.625,2.375 13.5,2.375 13.5,0 13.625,0
  SIG2 region: 0,0.125 0,-1 15.875,-1 15.875,0.125
  SIG2 region: 15.875,2.375 15.75,2.375 15.75,0 15.875,0
  SIG2 region: 15.875,2.25 15.875,2.375 13.5,2.375 13.5,2.25
  SIG2 region: 15.75,0 15.875,0 15.875,2.375 15.75,2.375
  SIG2 pour cut-out: -1.8,2.5 -1.8,-1 16,-1 16,2.5
LYR-MARKER-SIGNAL-8 [mm]
  Top region: 16.35,0.125 16.35,-1 -1.775,-1 -1.775,0.125
  Top region: -1.775,2.25 -1.775,2.375 0.6,2.375 0.6,2.25
  Top region: -1.775,2.375 -1.65,2.375 -1.65,0 -1.775,0
  Top region: 0.475,2.375 0.6,2.375 0.6,0 0.475,0
  Top region: 16.799,2.375 16.901,2.375 16.901,-1 16.799,-1
  Top region: 17.224,2.375 17.376,2.375 17.376,-1 17.224,-1
  Top region: 17.723,2.375 17.977,2.375 17.977,-1 17.723,-1
  Top pour cut-out: -1.8,2.5 -1.8,-1 18.25,-1 18.25,2.5
MTH_125MIL_NON-PLATED [mm] "Mounting Hole 125MIL Non-Plated"
  round 0 hole 3.175 unplated: 0(0,0)
STN_STENCIL_BOT_ZELFLEXQR-406x508 [mm] "Paste Mask Stencil BOTTOM - Zelflex 406x508"
  body extent 175.25,-219 177.25,-217
STN_STENCIL_TOP_ZELFLEXQR-406x508 [mm] "Paste Mask Stencil TOP - Zelflex 406x508"
  body extent -177.25,-219 -175.25,-217

## Nets (pads, with @x,y where several pads share a name; then routed paths per layer and width w, separated by ;. In a path a pad name is that pad's centre, name@x,y a point inside that pad or via, vN(x,y) a via of type N, cw(c..) or ccw(c..) an arc to the next point about the centre after c; other vN are vias at no path point)
2V5: 
-HV: 
-HV_MID: 
ADAPTER_BOARD_ID: 
GND: 
M1_1V8_A_LDO_IN: 
M1_1V8_A_LDO_OUT: 
M1_1V8_ANALOG: 
M1_1V8_D_LDO_IN: 
M1_1V8_D_LDO_OUT: 
M1_1V8_DIGITAL: 
M1_CLK_N: 
M1_CLK_P: 
M1_CMD_IN_N: 
M1_CMD_IN_P: 
M1_CMD_OUT_N: 
M1_CMD_OUT_P: 
M1_DRAIN_PI_A: 
M1_DRAIN_PI_B: 
M1_GRILLE_PI_A: 
M1_GRILLE_PI_B: 
M1_HSL_N: 
M1_HSL_P: 
M1_RST: 
M1_SORTIE_PI_A: 
M1_SORTIE_PI_B: 
M1_SOURCE_-HV_A: 
M1_SOURCE_-HV_B: 
M1_SYNC_N: 
M1_SYNC_P: 
M2_1V8_A_LDO_IN: 
M2_1V8_A_LDO_OUT: 
M2_1V8_ANALOG: 
M2_1V8_D_LDO_IN: 
M2_1V8_D_LDO_OUT: 
M2_1V8_DIGITAL: 
M2_CLK_N: 
M2_CLK_P: 
M2_CMD_IN_N: 
M2_CMD_IN_P: 
M2_CMD_OUT_N: 
M2_CMD_OUT_P: 
M2_DRAIN_PI_A: 
M2_DRAIN_PI_B: 
M2_GRILLE_PI_A: 
M2_GRILLE_PI_B: 
M2_HSL_N: 
M2_HSL_P: 
M2_RST: 
M2_SORTIE_PI_A: 
M2_SORTIE_PI_B: 
M2_SOURCE_-HV_A: 
M2_SOURCE_-HV_B: 
M2_SYNC_N: 
M2_SYNC_P: 
pads on no net: Designator22.0

## Polygon pours and split planes (outlines as drawn)
M2_SOURCE_-HV_B on Top "Top-M2_SOURCE_-HV_B 1" (solid, pour order 86): 20.433,18.922
no net on Top "Top-No Net" (solid, pour order 50): 29.773,43.407
no net on Top "Top-No Net 1" (solid, pour order 44): 29.073,43.977
no net on Top "Top-No Net 2" (solid, pour order 42): 29.264,44.353
no net on Top "Top-No Net 3" (solid, pour order 40): 29.169,43.953
no net on Top "Top-No Net 4" (solid, pour order 38): 31.84,55.099
no net on Top "Top-No Net 5" (solid, pour order 36): 31.934,55.499
no net on Top "Top-No Net 6" (solid, pour order 34): 31.744,55.123
no net on Top "Top-No Net 7" (solid, pour order 28): 32.443,54.553
no net on Top "Top-No Net 8" (solid, pour order 22): 32.443,43.407
no net on Top "Top-No Net 9" (solid, pour order 14): 31.744,43.977
no net on Top "Top-No Net 10" (solid, pour order 8): 31.934,44.353
no net on Top "Top-No Net 11" (solid, pour order 2): 31.84,43.953
no net on Top "Top-No Net 12" (solid, pour order 0): -22.995,-3.105
no net on SIG1 "SIG1-No Net 3" (solid, pour order 171): 26.197,132.923
no net on SIG1 "SIG1-No Net 1" (hatched 45Degree grid 0.508 track 0.203, pour order 149): 22.005,52.555
no net on SIG1 "SIG1-No Net 2" (hatched 45Degree grid 0.508 track 0.203, pour order 145): 22.005,52.555
no net on SIG1 "SIG1-No Net" (solid, pour order 116): 35.386,49.847
M2_SOURCE_-HV_B on SIG1 "SIG1-M2_SOURCE_-HV_B" (solid, pour order 108): 27.064,33.674
GND on GND1 (split plane): 79.998,1.592 77.623,1.592 77.623,3.967 79.998,3.967
GND on GND1 (split plane): 177.29,0.51 0.51,0.51 0.51,172.21 177.29,172.21
M2_1V8_ANALOG on PWR1 (split plane): 82.248,1.592 79.873,1.592 79.873,3.967 82.248,3.967
M2_1V8_ANALOG on PWR1 (split plane): 177.29,0.51 0.51,0.51 0.51,172.21 177.29,172.21
GND on GND2 (split plane): 84.498,1.592 82.123,1.592 82.123,3.967 84.498,3.967
GND on GND2 (split plane): 177.29,0.51 0.51,0.51 0.51,172.21 177.29,172.21
GND on GND3 (split plane): 88.998,1.592 86.623,1.592 86.623,3.967 88.998,3.967
GND on GND3 (split plane): 177.29,0.51 0.51,0.51 0.51,172.21 177.29,172.21

## Other copper
Top:
  text "LAYER 1: TOP" at 276.797,135.463 h2.54
SIG1:
  text "LAYER 5: SIG1" at 276.797,118.1 h2.54
SIG2:
  text "LAYER 7: SIG2" at 276.797,109.419 h2.54
Bottom:
  text "LAYER 8: BOTTOM" at 276.797,105.078 h2.54
GND1 (plane layer: these items are gaps in the copper):
  text "LAYER 2: GND1" at 276.797,131.123 h2.54
PWR1 (plane layer: these items are gaps in the copper):
  text "LAYER 3: PWR1" at 276.797,126.782 h2.54
GND2 (plane layer: these items are gaps in the copper):
  text "LAYER 4: GND2" at 276.797,122.441 h2.54
GND3 (plane layer: these items are gaps in the copper):
  text "LAYER 6: GND3" at 276.797,113.76 h2.54

## Silkscreen, mask and mechanical layers (free items; w line width, h text height)
Top Overlay:
  text "TOP SILKSCREEN" at 276.797,144.145 h2.54
Bottom Overlay:
  text "BOTTOM SILKSCREEN" at 276.797,96.397 h2.54
Top Paste:
  text "TOP PASTEMASK" at 276.797,61.027 h2.54
Bottom Paste:
  text "BOTTOM PASTEMASK" at 276.797,34.416 h2.54
Top Solder:
  text "TOP SOLDERMASK" at 276.797,139.804 h2.54
Bottom Solder:
  text "BOTTOM SOLDERMASK" at 276.797,100.737 h2.54
Top Assembly:
  text "TOP ASSEMBLY" at 276.797,56.613 h2.54
Bottom Assembly:
  text "BOTTOM ASSEMBLY" at 276.797,30.137 h2.54
Top Designators:
  text "TOP DESIGNATORS" at 276.797,52.334 h2.54
Bottom Designators:
  text "BOTTOM DESIGNATORS" at 276.797,21.579 h2.54
Board Outline:
  text "BOARD OUTLINE" at 276.797,85.628 h2.54
Panel Outline:
  the board outline again, w0.127
  text "PANEL OUTLINE" at 276.797,81.349 h2.54
Route Tool Path:
  lines w2.54: 71.12,0 95.25,0
  text "ROUTE TOOL PATH" at 276.797,77.07 h2.54
Panel V-Grove:
  lines w0.127: -5.08,10.762 182.88,10.762 ; -5.08,161.958 182.88,161.958 ; 33.63,-5.08 33.63,177.8 ; 67.09,-5.08 67.09,177.8 ; 100.55,-5.08 100.55,177.8 ; 134.01,-5.08 134.01,177.8 ; 167.47,-5.08 167.47,177.8
  text "V-GROOVE" at -20.837,161.096 h2
  text "PANEL V-GROOVE" at 276.797,72.791 h2.54
  text "V-GROOVE" at -21.283,9.353 h2
  text "V-GROOVE" at 34.664,-21.007 h2 r90
  text "V-GROOVE" at 68.124,-21.007 h2 r90
  text "V-GROOVE" at 101.584,-21.007 h2 r90
  text "V-GROOVE" at 135.044,-21.007 h2 r90
  text "V-GROOVE" at 168.504,-21.007 h2 r90
Manufacturing Notes:
  text "MANUFACTURING NOTES" at 276.797,13.021 h2.54
Top 3D Models:
  text "TOP 3D MODELS" at 276.797,43.775 h2.54
Bottom 3D Models:
  text "BOTTOM 3D MODELS" at 276.797,17.3 h2.54
Top Courtyard:
  text "TOP COURTYARD" at 276.797,48.055 h2.54
Bottom Courtyard:
  text "BOTTOM COURTYARD" at 276.797,25.858 h2.54
Drill Drawing:
  circle w0.254: c338.167,36.219 r0.847
  circle w0.254: c338.167,36.219 r0.847
  lines w0.254: 337.32,35.373 339.014,35.373 ; 337.32,35.373 337.32,37.066 ; 337.32,35.373 339.014,35.373 ; 337.32,35.373 337.32,37.066 ; 337.32,37.066 339.014,37.066 ; 337.32,37.066 339.014,37.066 ; 339.014,35.373 339.014,37.066 ; 339.014,35.373 339.014,37.066 ; 337.32,40.876 339.014,40.876 338.167,39.183 337.32,40.876 ; 337.32,43.416 337.744,43.416 338.167,42.993 338.59,43.416 339.014,43.416 338.59,43.839 339.014,44.263 338.59,44.263 338.167,44.686 337.744,44.263 337.32,44.263 337.744,43.839 337.32,43.416 ; 337.32,47.649 338.167,46.803 339.014,47.649 338.167,48.496 337.32,47.649 ; 337.32,50.613 339.014,50.613 339.014,52.306 337.32,52.306 337.32,50.613 ; 337.32,54.423 337.32,54.846 337.744,55.269 337.32,55.693 337.32,56.116 337.744,56.116 338.167,55.693 338.59,56.116 339.014,56.116 339.014,55.693 338.59,55.269 339.014,54.846 339.014,54.423 338.59,54.423 338.167,54.846 337.744,54.423 337.32,54.423 ; 337.32,59.926 339.014,59.926 338.167,58.233 337.32,59.926 ; 337.32,62.466 337.744,62.466 337.744,62.043 338.59,62.043 338.59,62.466 339.014,62.466 339.014,63.313 338.59,63.313 338.59,63.736 337.744,63.736 337.744,63.313 337.32,63.313 337.32,62.466 ; 337.32,65.853 338.167,66.276 339.014,65.853 338.59,66.699 339.014,67.546 338.167,67.123 337.32,67.546 337.744,66.699 337.32,65.853 ; 337.659,35.711 338.675,35.711 338.675,36.727 337.659,36.727 337.659,35.711 ; 337.659,40.537 338.675,40.537 338.167,39.521 337.659,40.537
  lines w0.381: 335.801,68.52 492.274,68.52 ; 349.794,72.33 349.794,30.42 ; 364.522,30.42 364.522,72.33 ; 365.03,30.42 365.03,41.85 ; 393.215,30.42 393.215,41.85 ; 394.485,30.42 394.485,41.85 ; 395.501,30.42 395.501,72.33 ; 396.009,30.42 396.009,41.85 ; 406.065,30.42 406.065,41.85 ; 407.334,30.42 407.334,41.85 ; 408.35,30.42 408.35,72.33 ; 408.858,30.42 408.858,41.85 ; 424.703,30.42 424.703,41.85 ; 425.973,30.42 425.973,41.85 ; 426.989,30.42 426.989,72.33 ; 427.496,30.42 427.496,41.85 ; 454.921,30.42 454.921,41.85 ; 456.19,30.42 456.19,41.85 ; 457.206,30.42 457.206,72.33 ; 457.714,30.42 457.714,41.85 ; 469.903,30.42 469.903,41.85 ; 471.172,30.42 471.172,41.85 ; 472.188,30.42 472.188,72.33 ; 472.696,30.42 472.696,41.85 ; 489.989,34.23 335.801,34.23 ; 489.989,38.04 335.801,38.04 ; 491.259,34.23 335.801,34.23 ; 491.259,38.04 335.801,38.04 ; 492.274,34.23 335.801,34.23 ; 492.782,34.23 335.801,34.23 ; 492.782,38.04 335.801,38.04 ; 335.801,30.42 489.989,30.42 489.989,41.85 335.801,41.85 ; 335.801,30.42 335.801,41.85 ; 335.801,30.42 492.782,30.42 492.782,41.85 335.801,41.85 ; 335.801,30.42 335.801,41.85 ; 335.801,30.42 491.259,30.42 491.259,41.85 335.801,41.85 ; 335.801,30.42 335.801,41.85 ; 335.801,30.42 492.274,30.42 492.274,72.33 335.801,72.33 335.801,30.42 ; 349.794,30.42 349.794,41.85 ; 349.794,30.42 349.794,41.85 ; 349.794,30.42 349.794,41.85 ; 366.299,30.42 366.299,41.85 366.299,30.42
  text "Symbol" at 338.087,69.663 h1.83
  text "Count" at 350.937,69.663 h1.83
  text "Hole Size" at 365.665,69.663 h1.83
  text "Plated" at 396.644,69.663 h1.83
  text "Hole Type" at 409.493,69.663 h1.83
  text "Drill Layer Pair" at 428.132,69.663 h1.83
  text "Via/Pad" at 458.349,69.663 h1.83
  text "Pad Shape" at 473.331,69.663 h1.83
  text "DRILL DRAWING" at 276.797,69.029 h2.54
  text "6" at 350.937,65.853 h1.52
  text "125,000mil (3,175mm)" at 365.665,65.853 h1.52
  text "NPTH" at 396.644,65.853 h1.52
  text "Round" at 409.493,65.853 h1.52
  text "Top - Bottom" at 428.132,65.853 h1.52
  text "Pad" at 458.349,65.853 h1.52
  text "Rounded" at 473.331,65.853 h1.52
  text "10" at 350.937,62.043 h1.52
  text "45,276mil (1,150mm)" at 365.665,62.043 h1.52
  text "PTH" at 396.644,62.043 h1.52
  text "Round" at 409.493,62.043 h1.52
  text "Top - Bottom" at 428.132,62.043 h1.52
  text "Pad" at 458.349,62.043 h1.52
  text "Rounded" at 473.331,62.043 h1.52
  text "10" at 350.937,58.233 h1.52
  text "57,087mil (1,450mm)" at 365.665,58.233 h1.52
  text "NPTH" at 396.644,58.233 h1.52
  text "Round" at 409.493,58.233 h1.52
  text "Top - Bottom" at 428.132,58.233 h1.52
  text "Pad" at 458.349,58.233 h1.52
  text "Rounded" at 473.331,58.233 h1.52
  text "10" at 350.937,54.423 h1.52
  text "57,087mil (1,450mm)" at 365.665,54.423 h1.52
  text "NPTH" at 396.644,54.423 h1.52
  text "Round" at 409.493,54.423 h1.52
  text "Top - Bottom" at 428.132,54.423 h1.52
  text "Pad" at 458.349,54.423 h1.52
  text "Rounded" at 473.331,54.423 h1.52
  text "10" at 350.937,50.613 h1.52
  text "118,110mil (3,000mm)" at 365.665,50.613 h1.52
  text "NPTH" at 396.644,50.613 h1.52
  text "Round" at 409.493,50.613 h1.52
  text "Top - Bottom" at 428.132,50.613 h1.52
  text "Pad" at 458.349,50.613 h1.52
  text "Rounded" at 473.331,50.613 h1.52
  text "20" at 350.937,46.803 h1.52
  text "11,811mil (0,300mm)" at 365.665,46.803 h1.52
  text "PTH" at 396.644,46.803 h1.52
  text "Round" at 409.493,46.803 h1.52
  text "Top - Bottom" at 428.132,46.803 h1.52
  text "Via" at 458.349,46.803 h1.52
  text "Rounded" at 473.331,46.803 h1.52
  text "20" at 350.937,42.993 h1.52
  text "27,953mil (0,710mm)" at 365.665,42.993 h1.52
  text "PTH" at 396.644,42.993 h1.52
  text "Round" at 409.493,42.993 h1.52
  text "Top - Bottom" at 428.132,42.993 h1.52
  text "Pad" at 458.349,42.993 h1.52
  text "Rounded" at 473.331,42.993 h1.52
  text "Symbol" at 338.087,39.183 h1.83
  text "Symbol" at 338.087,39.183 h1.83
  text "Symbol" at 338.087,39.183 h1.83
  text "Count" at 350.937,39.183 h1.83
  text "Count" at 350.937,39.183 h1.83
  text "Count" at 350.937,39.183 h1.83
  text "20" at 350.937,39.183 h1.52
  text "53,150mil (1,350mm)" at 365.665,39.183 h1.52
  text "Hole Size" at 366.173,39.183 h1.83
  text "Hole Size" at 367.442,39.183 h1.83
  text "Hole Size" at 367.442,39.183 h1.83
  text "Plated" at 394.358,39.183 h1.83
  text "Plated" at 395.628,39.183 h1.83
  text "PTH" at 396.644,39.183 h1.52
  text "Plated" at 397.152,39.183 h1.83
  text "Hole Type" at 407.208,39.183 h1.83
  text "Hole Type" at 408.477,39.183 h1.83
  text "Round" at 409.493,39.183 h1.52
  text "Hole Type" at 410.001,39.183 h1.83
  text "Drill Layer Pair" at 425.846,39.183 h1.83
  text "Drill Layer Pair" at 427.116,39.183 h1.83
  text "Top - Bottom" at 428.132,39.183 h1.52
  text "Drill Layer Pair" at 428.639,39.183 h1.83
  text "Via/Pad" at 456.064,39.183 h1.83
  text "Via/Pad" at 457.333,39.183 h1.83
  text "Pad" at 458.349,39.183 h1.52
  text "Via/Pad" at 458.857,39.183 h1.83
  text "Pad Shape" at 471.046,39.183 h1.83
  text "Pad Shape" at 472.315,39.183 h1.83
  text "Rounded" at 473.331,39.183 h1.52
  text "Pad Shape" at 473.839,39.183 h1.83
  text "590" at 350.937,35.373 h1.52
  text "1265" at 350.937,35.373 h1.52
  text "1265" at 350.937,35.373 h1.52
  text "75" at 350.937,35.373 h1.52
  text "30,000mil (0,762mm)" at 365.665,35.373 h1.52
  text "4,000mil (0,102mm)" at 366.173,35.373 h1.52
  text "10,000mil (0,254mm)" at 367.442,35.373 h1.52
  text "4,000mil (0,102mm)" at 367.442,35.373 h1.52
  text "PTH" at 394.358,35.373 h1.52
  text "PTH" at 395.628,35.373 h1.52
  text "NPTH" at 396.644,35.373 h1.52
  text "PTH" at 397.152,35.373 h1.52
  text "Round" at 407.208,35.373 h1.52
  text "Round" at 408.477,35.373 h1.52
  text "Round" at 409.493,35.373 h1.52
  text "Round" at 410.001,35.373 h1.52
  text "SIG2 - Bottom" at 425.846,35.373 h1.52
  text "Top - GND1" at 427.116,35.373 h1.52
  text "Top - Bottom" at 428.132,35.373 h1.52
  text "GND1 - SIG2" at 428.639,35.373 h1.52
  text "Via" at 456.064,35.373 h1.52
  text "Via" at 457.333,35.373 h1.52
  text "Pad" at 458.349,35.373 h1.52
  text "Via" at 458.857,35.373 h1.52
  text "Rounded" at 471.046,35.373 h1.52
  text "Rounded" at 472.315,35.373 h1.52
  text "Rounded" at 473.331,35.373 h1.52
  text "Rounded" at 473.839,35.373 h1.52
  text "590 Total" at 350.937,31.563 h1.52
  text "1265 Total" at 350.937,31.563 h1.52
  text "1265 Total" at 350.937,31.563 h1.52
  text "181 Total" at 350.937,31.563 h1.52

## Dimensions
177.8,172.72 to 177.8,0 on Drill Drawing
0,172.72 to 177.8,172.72 on Drill Drawing

## Panel: embedded boards
"UHR_AB.PcbDoc" at 10.33,10.762, 1 rows x 5 columns, spacing 63.5 x 33.46, rotation 0

## Text inside footprints (layer, text, board x,y; h text height)
Designator41: Top "1" at 76.298,2.142 h2; Manufacturing Notes "Preserve Stacking Stripes Integrity during Router Tooling" at 76.873,-7.908 h1
Designator42: Bottom "8" at 92.773,2.142 h2
Designator45: GND1 "2" at 78.448,2.142 h2
Designator46: PWR1 "3" at 80.726,2.144 h2
Designator47: GND2 "4" at 82.903,2.144 h2
Designator48: SIG1 "5" at 85.152,2.142 h2
Designator49: GND3 "6" at 87.436,2.159 h2
Designator51: SIG2 "7" at 89.724,2.142 h2
Designator52: Top Paste "TOP" at 204.269,-154.161 h4; Top Paste "STENCIL THICKNESS -" at 4.964,-178.616 h6.5; Top Paste "354 MM" at 81.464,280.608 h3; Top Paste "438 MM" at -87.286,52.358 h3 r90; Top Paste "Revision" at -0.536,-151.4 h2
Designator53: Bottom Paste "Revision" at 174.989,-151.4 h2; Bottom Paste "438 MM" at 261.739,52.358 h3 r270; Bottom Paste "STENCIL THICKNESS -" at 169.488,-178.616 h6.5; Bottom Paste "354 MM" at 92.989,280.608 h3; Bottom Paste "BOTTOM" at -23.761,-154.892 h4